# Altium PCB HYDRA_V3_TEMPLATE.PcbDoc
Units mm, origin at the board's own origin, x right, y up, seen from the top; angles counter-clockwise.
Board outline 50 x 45 mm, 4 copper layers (Top Layer, PWR, GND, Bottom Layer), stack 0.603 mm thick; 84 components, 47 nets, 355 pads, 88 vias.
Unrouted connection lines stored in the file: 1.
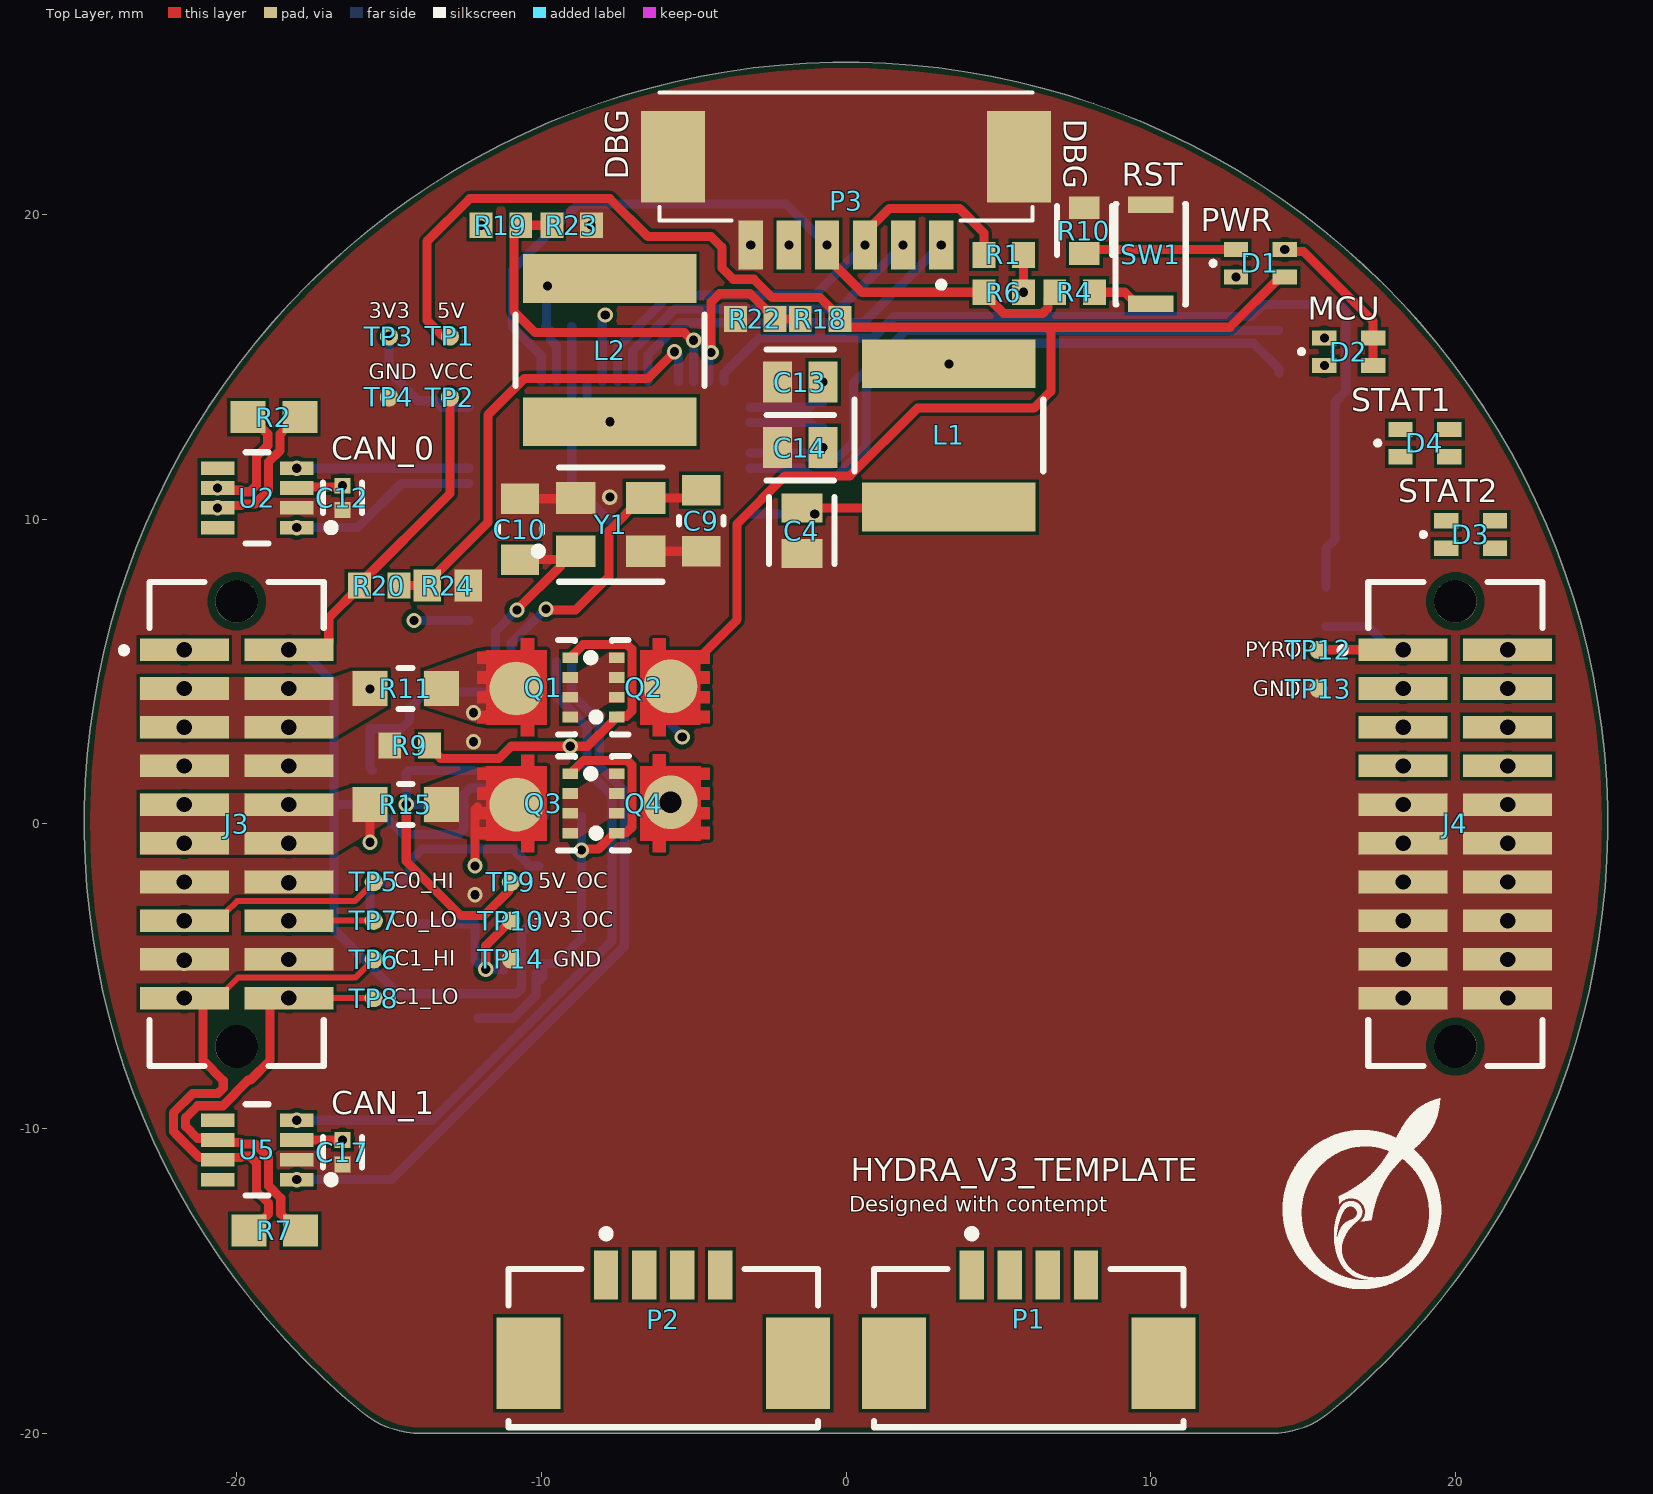
[diagram p0: Top Layer view]
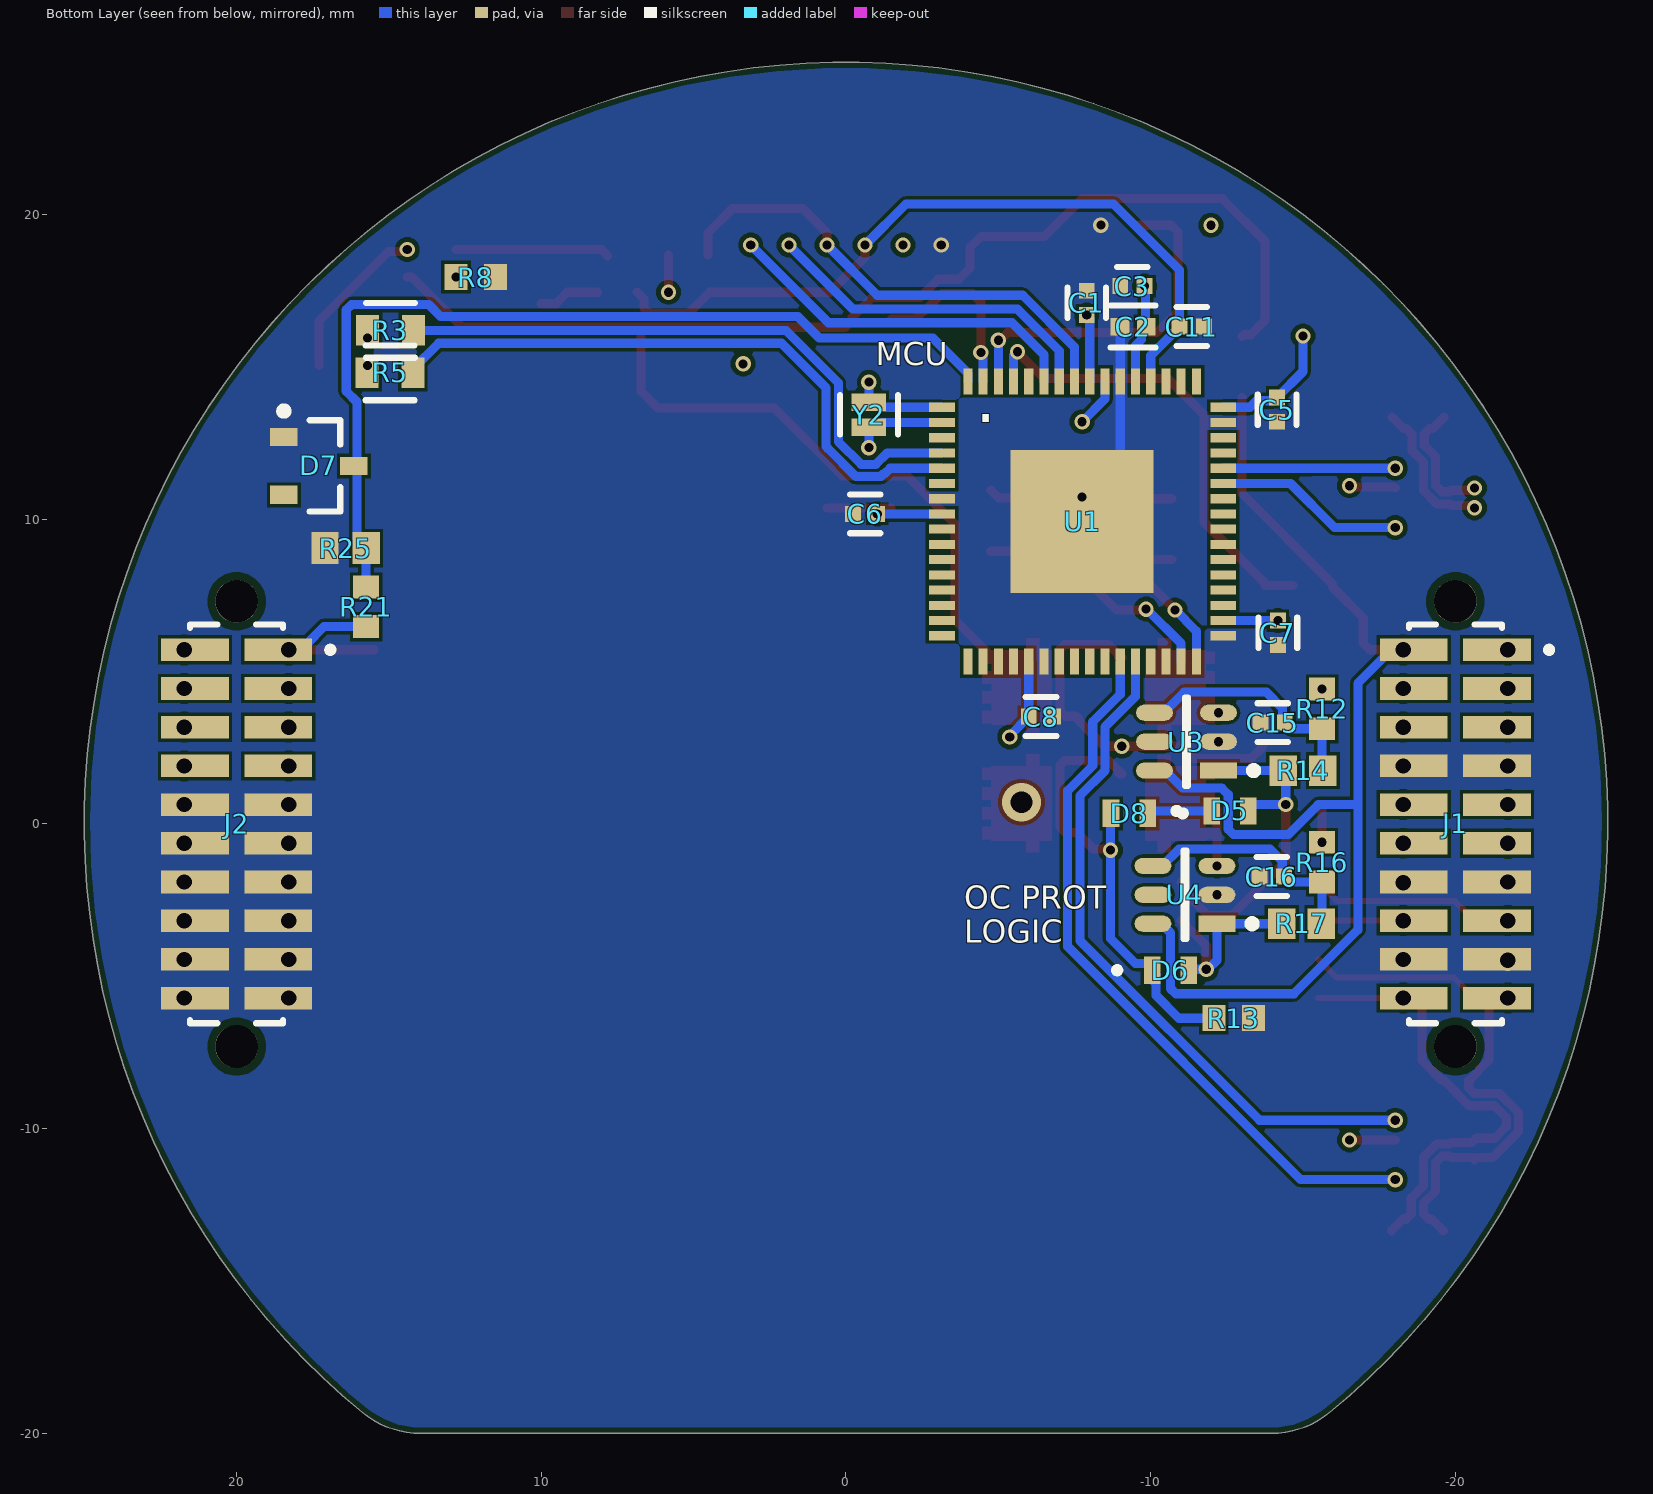
[diagram p1: Bottom Layer view, seen from below]
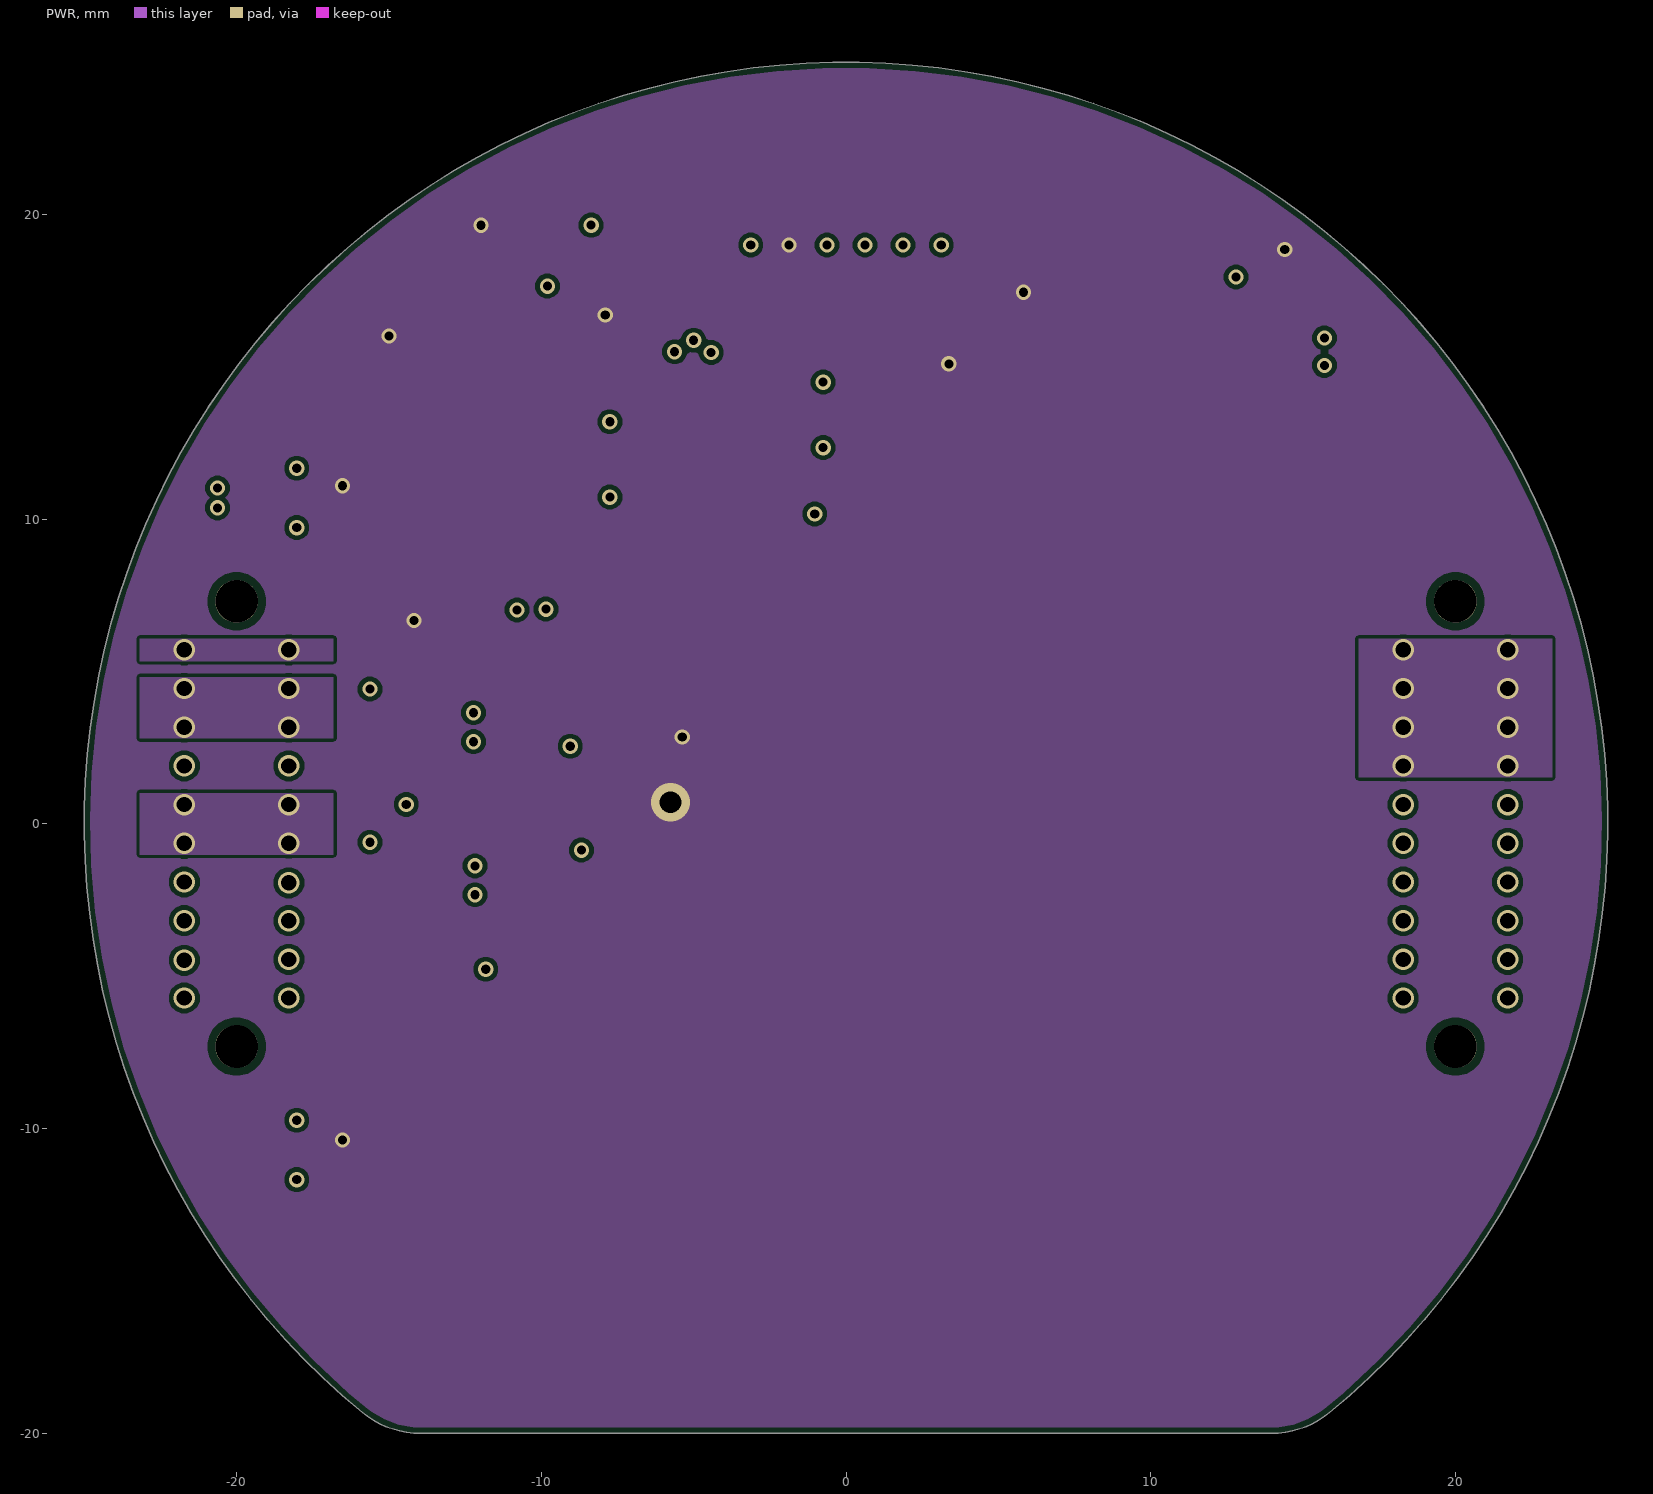
[diagram p2: PWR]
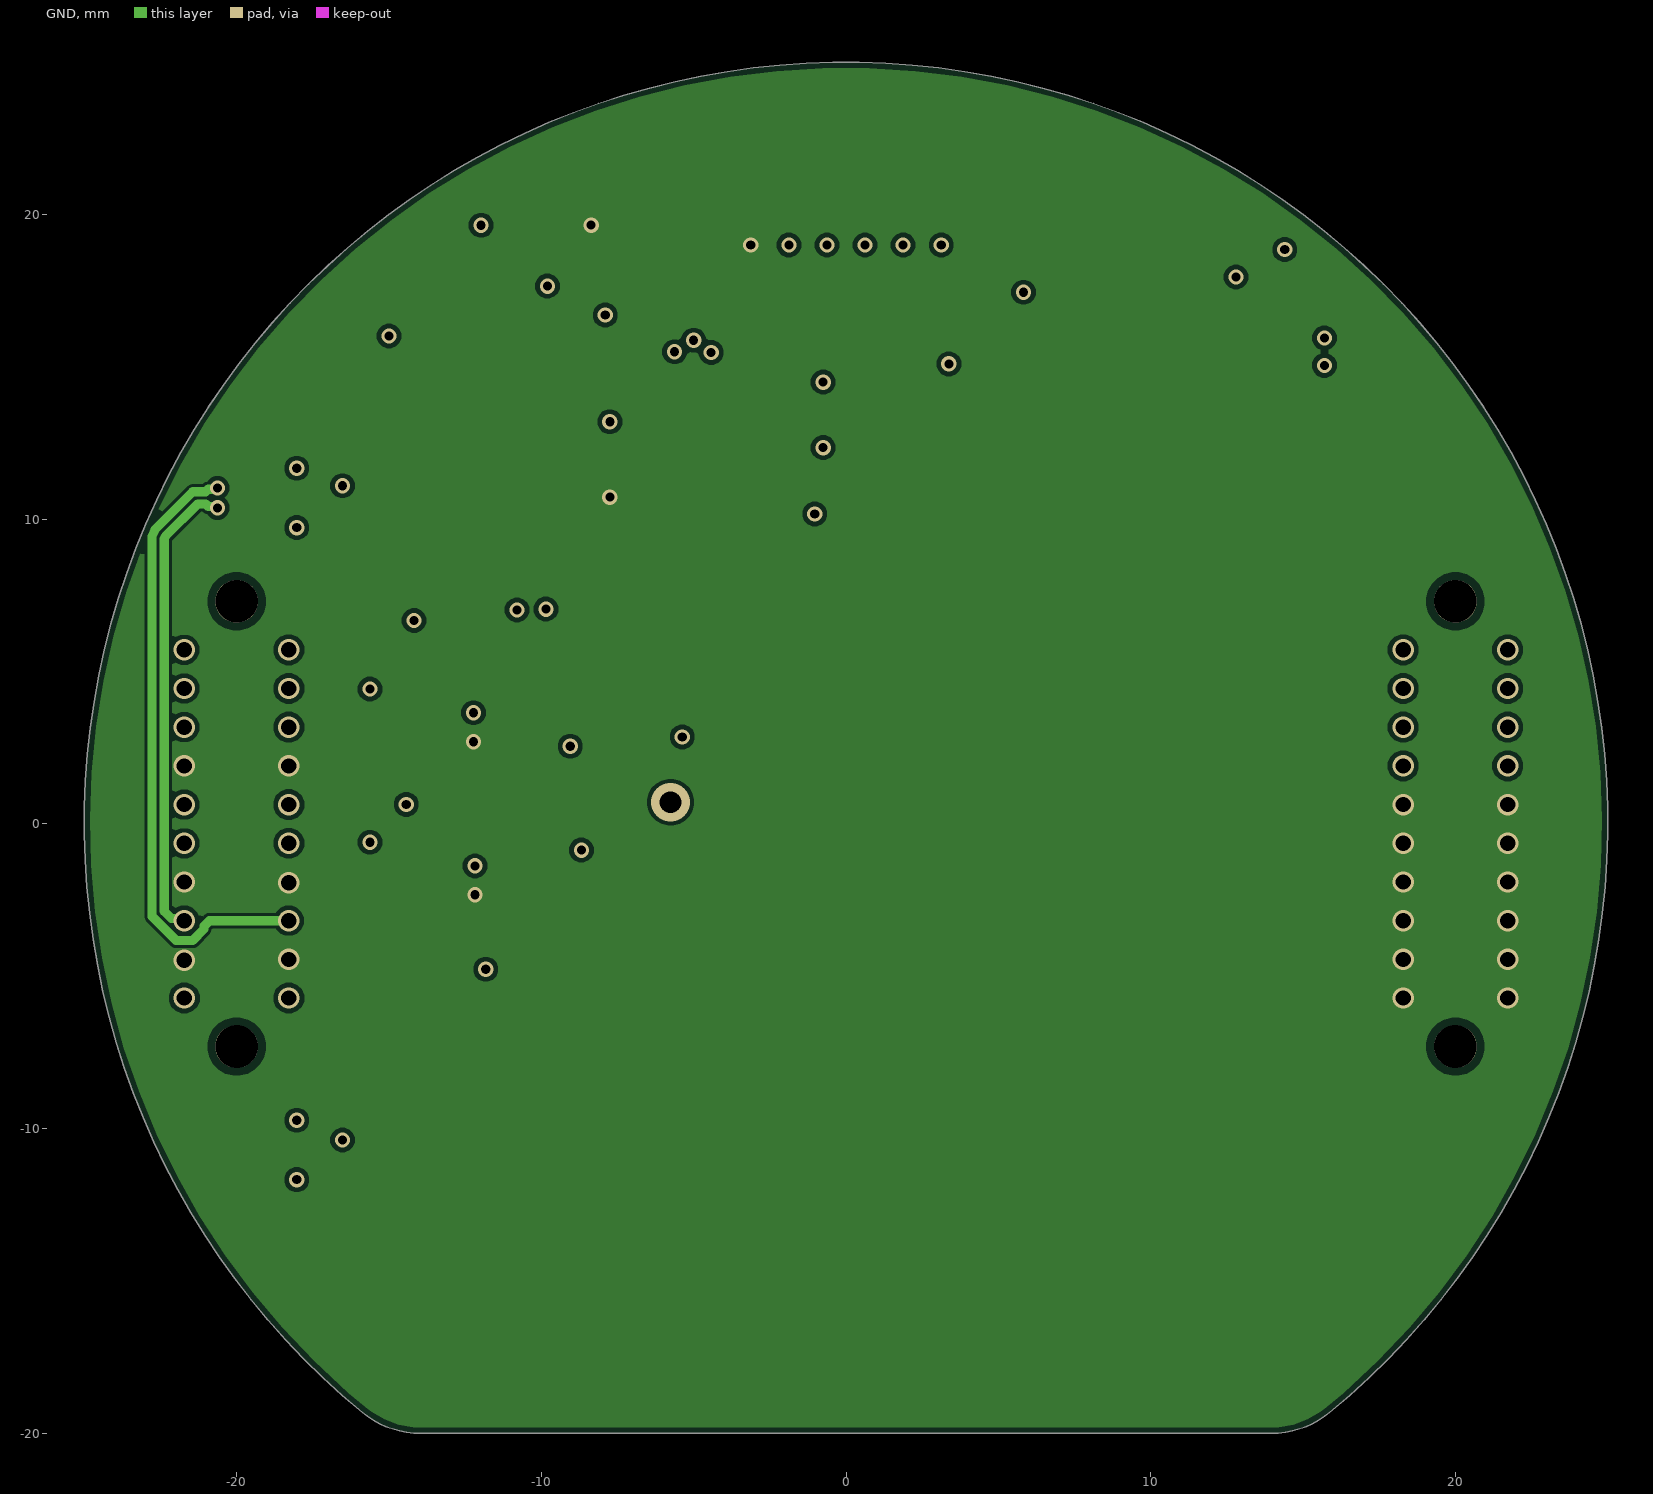
[diagram p3: GND]
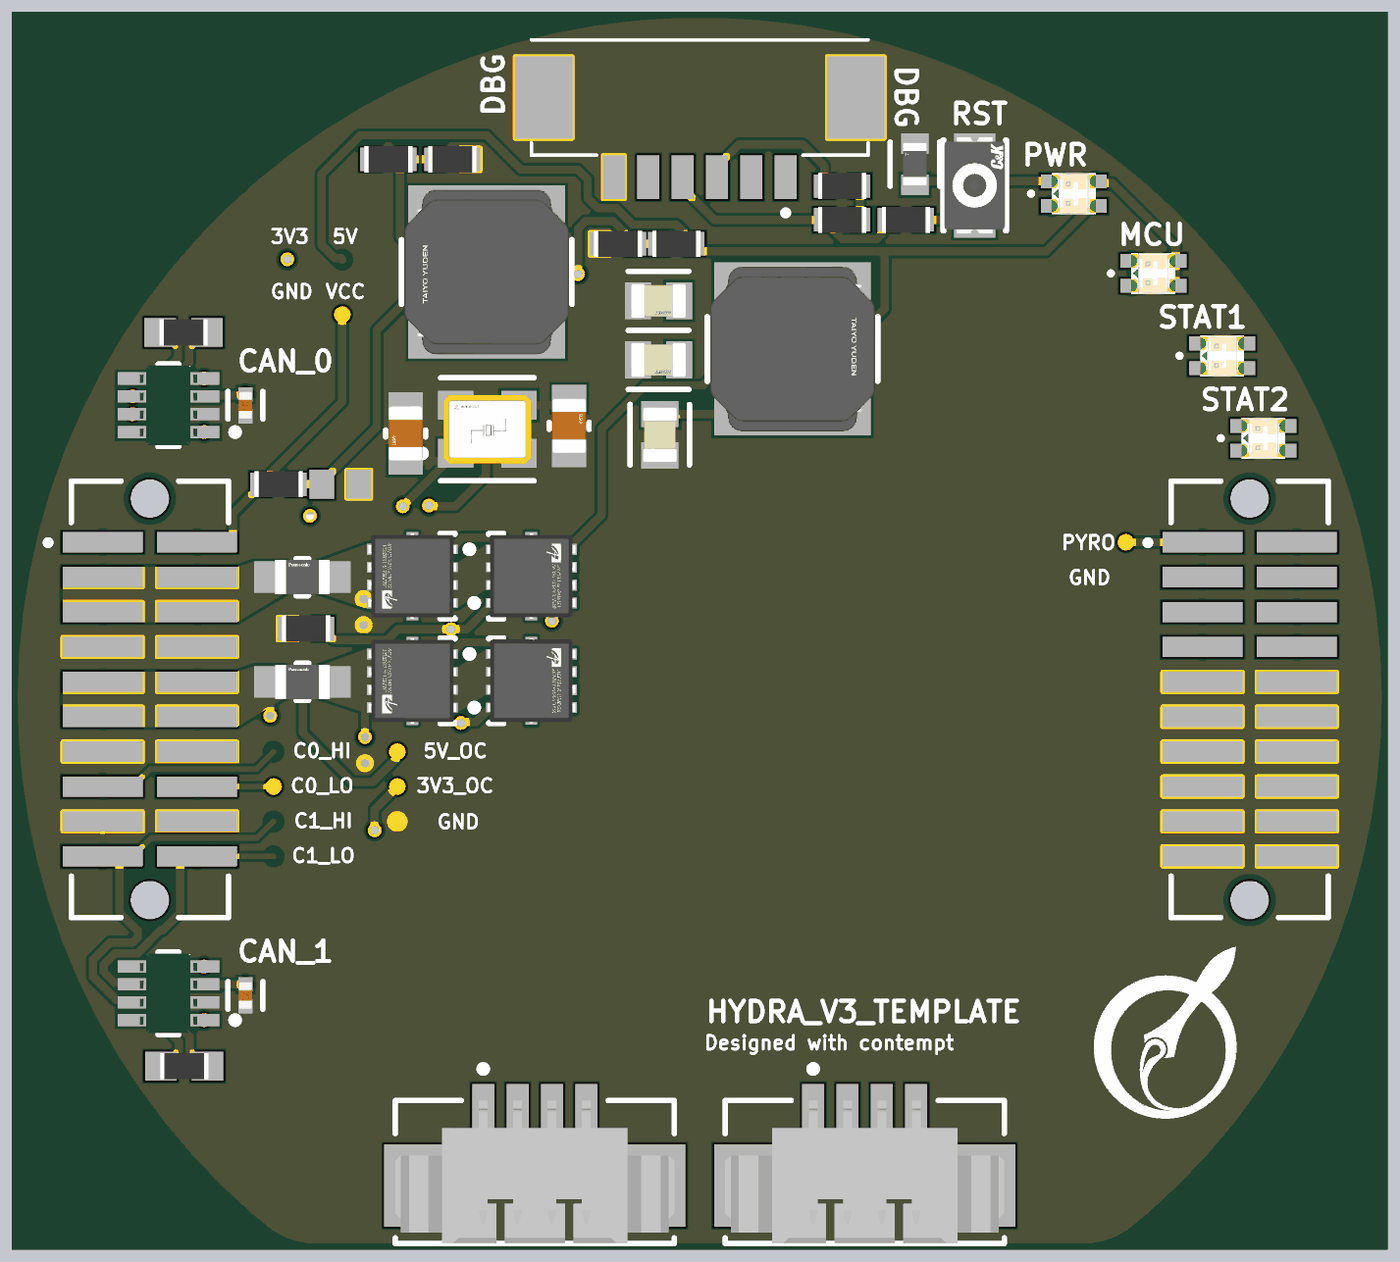
[diagram p4: 3D render of the assembled board from above, using the file's embedded part models]
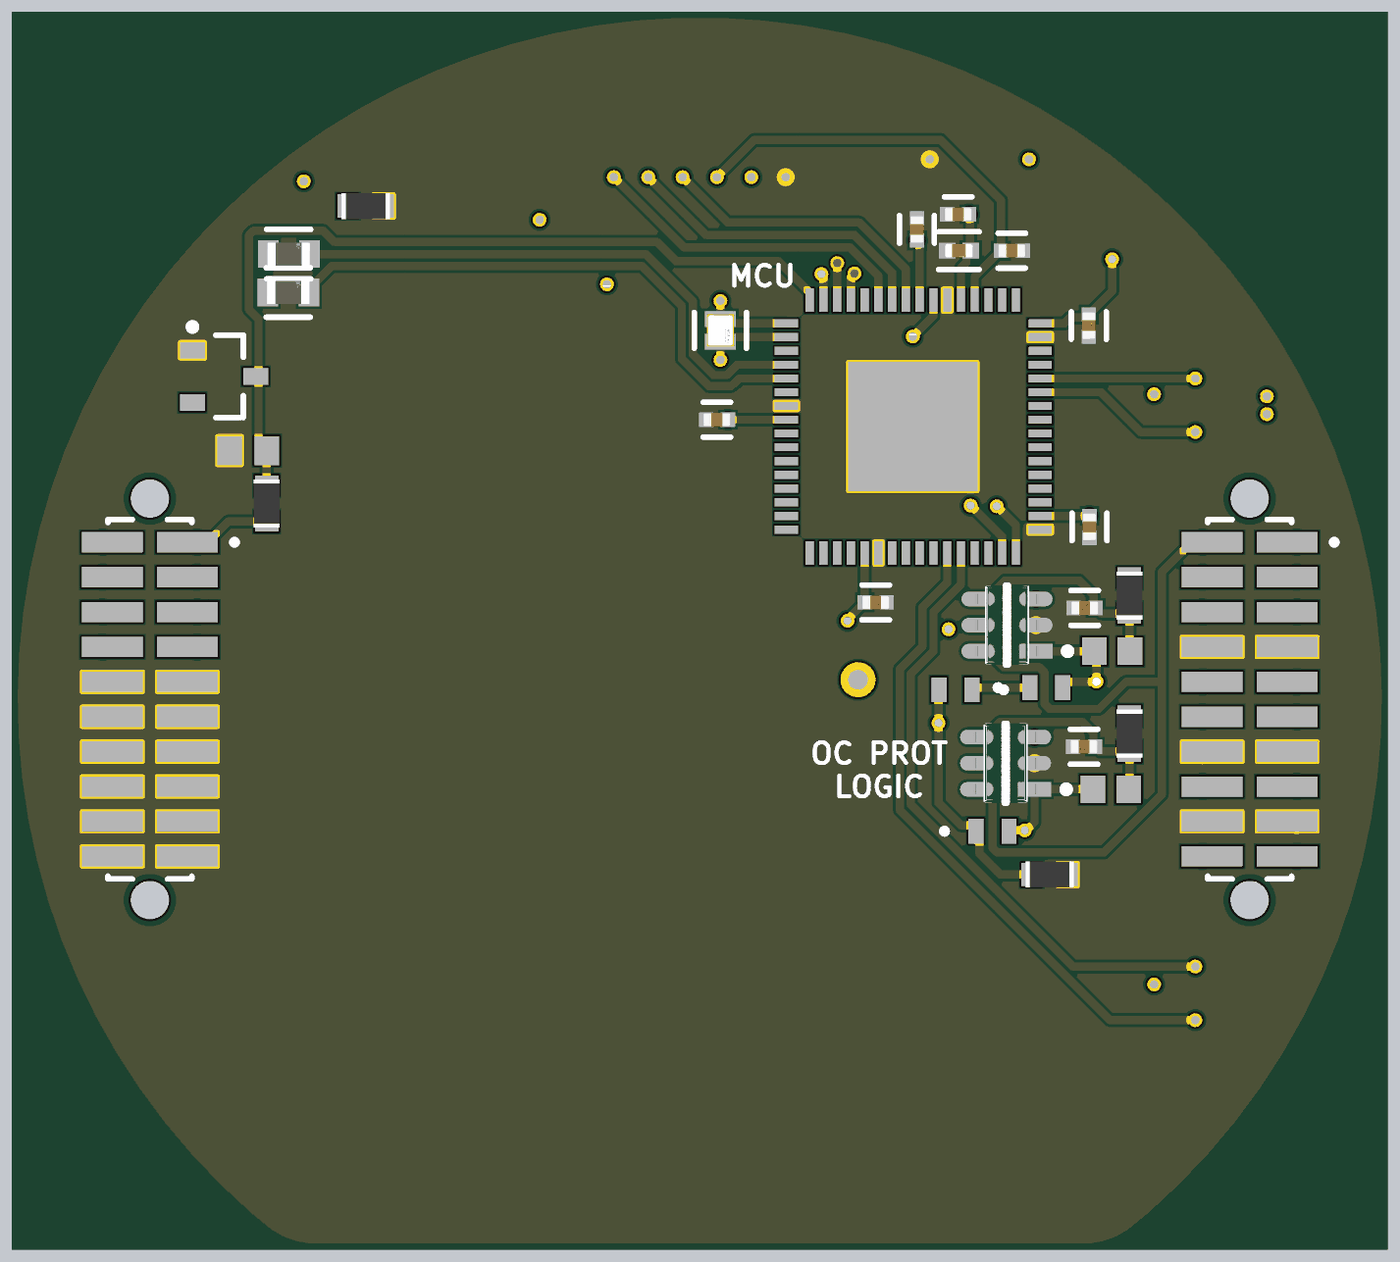
[diagram p5: 3D render of the assembled board from below, using the file's embedded part models]

## Layer stack, top to bottom
Top Solder: solder mask 0.0102, Solder Resist, Dk 3.5
Top Layer: signal copper 0.0356
Dielectric 2: prepreg 0.0711, PP-006, Dk 4.1
PWR: signal copper 0.035
Dielectric 1: dielectric 0.32, FR-4, Dk 4.8
GND: signal copper 0.035
Dielectric 3: prepreg 0.0711, PP-006, Dk 4.1
Bottom Layer: signal copper 0.0356
Bottom Solder: solder mask 0.0102, Solder Resist, Dk 3.5

## Board outline
-15.888,-19.298 ccw(c-13.96,-17) -13.96,-20 13.96,-20 ccw(c13.96,-17) 15.888,-19.298 15.868,-19.318 ccw(c0,0)

## Design rules (kind name [scope] priority, off if disabled: settings)
BoardOutlineClearance [All] p1: gap=0.2 ignorepadtopadclearanceinfootprint=FALSE
Clearance [All] p1: gap=0.102 ignorepadtopadclearanceinfootprint=FALSE except(0.127: Arc-Via Track-Via SMDPad-Via THPad-Via Via-Via Via-Fill Via-Poly Via-Region Via-Text; 0.25: Arc-Hole Track-Hole SMDPad-Hole THPad-Hole Via-Hole Fill-Hole Poly-Hole Region-Hole Text-Hole)
ComponentClearance [All] p1: gap=0.102 collisioncheckmode=3 verticalgap=0.102 showdistances=TRUE
DiffPairsRouting [All] p1: maxlimit=0.102 minlimit=0.102 mostfreqgap=0.102 toplayer_minwidth=0.102 toplayer_maxwidth=1816.048 toplayer_prefwidth=0.102 midlayer1_minwidth=0.102 midlayer1_maxwidth=1816.048 midlayer1_prefwidth=0.102 midlayer2_minwidth=0.102 midlayer2_maxwidth=1816.048 midlayer2_prefwidth=0.102 bottomlayer_minwidth=0.102 bottomlayer_maxwidth=1816.048 bottomlayer_prefwidth=0.102 maxuncoupledlength=12.7
Height [All] p1: minheight=0 maxheight=1816.048 prefheight=12.7
HoleSize [All] p1: absolutevalues=TRUE maxlimit=6.3 minlimit=0.2 maxpercent=80.000 minpercent=20.000
HoleToHoleClearance [All] p1: gap=0.25 allowstackedmicrovias=FALSE
MinimumAnnularRing [All] p1: minimumring=0.076
MinimumSolderMaskSliver [All] p1: minsoldermaskwidth=0
PlaneClearance [All] p1: clearance=0.102
PlaneConnect PlaneConnectPowerPads [InPadClass('PowerPads')] p1: planeconnectstyle=Direct reliefexpansion=0.508 reliefentries=4 reliefconductorwidth=0.254 reliefairgap=0.254
PlaneConnect [All] p2: pad.planeconnectstyle=Relief pad.reliefexpansion=0.3 pad.reliefentries=4 pad.reliefconductorwidth=0.102 pad.reliefairgap=0.102 via.planeconnectstyle=Direct via.reliefexpansion=0.3 via.reliefentries=4 via.reliefconductorwidth=0.127 via.reliefairgap=0.127
PolygonConnect PolygonConnectPowerPads [All vs (InPadClass('PowerPads'))] p1: connectstyle=Direct reliefconductorwidth=0.254 reliefentries=4 polygonreliefangle="90 Angle" airgapwidth=0.254
PolygonConnect [All] p2: thpad.connectstyle=Relief thpad.reliefconductorwidth=0.102 thpad.reliefentries=4 thpad.polygonreliefangle="90 Angle" thpad.airgapwidth=0.102 smdpad.connectstyle=Direct smdpad.reliefconductorwidth=0.102 smdpad.reliefentries=4 smdpad.polygonreliefangle="90 Angle" smdpad.airgapwidth=0.102 via.connectstyle=Direct via.reliefconductorwidth=0.127 via.reliefentries=4 via.polygonreliefangle="90 Angle" via.airgapwidth=0.127
RoutingVias [All] p1: holewidth=0.2 width=0.45 viastyle="Through Hole" minholewidth=0.2 minwidth=0.45 maxholewidth=6.3 maxwidth=6.55
SilkToSilkClearance [All] p1: silktosilkclearance=0
SilkToSolderMaskClearance [IsPad] p1: minsilkscreentomaskgap=0.102 clearancetoexposedcopper=TRUE
SolderMaskExpansion [All] p1: expansion=0.075 istentingtop=FALSE
Width [All] p1: maxlimit=1816.048 minlimit=0.102 preferedwidth=0.102
20 further rules are at their usual default settings.

## Classes and differential pairs
component class OC_PROT: C15 C16 D5 D6 D8 Q1 Q2 Q3 Q4 R9 R11 R12 R13 R14 R15 R16 R17 TP9 TP10 TP14 U3 U4
component class MCU_PINOUT: C1 C2 C3 C4 C5 C6 C7 C8 C9 C10 C11 C12 C13 C14 C17 D1 D2 D7 L1 L2 P3 R1 R2 R3 R4 R5 R6 R7 R8 R10 R18 R19 R20 R21 R22 R23 R24 R25 SW1 TP1 TP2 TP3 TP4 TP5 TP6 TP7 TP8 TP12 TP13 U1 U2 U5 Y1 Y2
component class HYDRA_V3_TEMPLATE: D3 D4 J1 J2 J3 J4 P1 P2
differential pair CAN1_R: +CAN1_R_P -CAN1_R_N
differential pair CAN0_R: +CAN0_R_P -CAN0_R_N

## Components (designator, comment, footprint, x,y, rotation, side; value= is the part's Value field where it differs from the comment)
C1 "C0402C104K8PACTU" FP-C0402-BB-MFG -7.9,17.1 r90 bottom value="0.10 μF"
C2 "GRM155R60J475ME47D" FP-GRM155-0_1-IPC_B -9.425,16.325 r180 bottom
C3 "C0402C104K8PACTU" FP-C0402-BB-MFG -9.4,17.65 r0 bottom value="0.10 μF"
C4 "C0805C106K8PACTU" FP-C0805C-DG-MFG -1.45,9.625 r270 top value=10uF
C5 "C0402C104K8PACTU" FP-C0402-BB-MFG -14.15,13.6 r270 bottom value="0.10 μF"
C6 "C0402C104K8PACTU" FP-C0402-BB-MFG -0.625,10.175 r0 bottom value="0.10 μF"
C7 "C0402C104K8PACTU" FP-C0402-BB-MFG -14.175,6.275 r270 bottom value="0.10 μF"
C8 "C0402C104K8PACTU" FP-C0402-BB-MFG -6.4,3.525 r180 bottom value="0.10 μF"
C9 "08051A6R8CAT2A" FP-0805-L_2_01_0_2-W_1_25-MFG -4.75,9.95 r90 top
C10 "08051A6R8CAT2A" FP-0805-L_2_01_0_2-W_1_25-MFG -10.7,9.675 r270 top
C11 "C0402C104K8PACTU" FP-C0402-BB-MFG -11.35,16.325 r180 bottom value="0.10 μF"
C12 "C0402C104K8PACTU" FP-C0402-BB-MFG -16.525,10.7 r90 top value="0.10 μF"
C13 "C0805C180J5GACTU" FP-C0805C-DN-MFG -1.5,14.5 r180 top value="18 pF"
C14 "C0805C180J5GACTU" FP-C0805C-DN-MFG -1.5,12.35 r180 top value="18 pF"
C15 "C0402C104K8PACTU" FP-C0402-BB-MFG -14,3.325 r0 bottom value="0.10 μF"
C16 "C0402C104K8PACTU" FP-C0402-BB-MFG -13.975,-1.725 r0 bottom value="0.10 μF"
C17 "C0402C104K8PACTU" FP-C0402-BB-MFG -16.525,-10.775 r90 top value="0.10 μF"
D1 "150066RG54050" WL-SBCD_0606 13.6,18.4 r90 top
D2 "150066RG54050" WL-SBCD_0606 16.5,15.5 r90 top
D3 "150066RG54050" WL-SBCD_0606 20.5,9.5 r90 top
D4 "150066RG54050" WL-SBCD_0606 19,12.5 r90 top
D5 "TS4148RCG" TS4148RCG-Footprint-1 -12.6,0.425 r180 bottom
D6 "TS4148RCG" TS4148RCG-Footprint-1 -10.65,-4.8 r180 bottom
D7 "BZX84-A3V3,215" SOT95P230X110-3N 17.3,11.75 r180 bottom
D8 "TS4148RCG" TS4148RCG-Footprint-1 -9.3,0.347 r0 bottom
J1 "SFML-110-02-L-D-A" SFML-110-02-L-D-A-Footprint-1 -20,0 r270 bottom
J2 "SFML-110-02-L-D-A" SFML-110-02-L-D-A-Footprint-1 20,0 r270 bottom
J3 "TFML-110-02-L-D-A" TFML-110-02-L-D-A-Footprint-1 -20,0 r270 top
J4 "TFML-110-02-L-D-A" TFML-110-02-L-D-A-Footprint-1 20,0 r270 top
L1 "NR6028T100M" FP-NR6028-MFG 3.375,12.75 r270 top
L2 "NR6028T100M" FP-NR6028-MFG -7.75,15.55 r90 top
P1 "53261-0471" MOLEX-53261-0471_V 6,-16.25 r0 top locked
P2 "53261-0471" MOLEX-53261-0471_V -6,-16.25 r0 top
P3 "0532610671" 0532610671-Footprint-1 0,19 r180 top locked
Q1 "SISH615ADN-T1-GE3" SISH615ADN-T1-GE3-Footprint-1 -10.452,4.445 r90 top
Q2 "SISH615ADN-T1-GE3" SISH615ADN-T1-GE3-Footprint-1 -6.127,4.52 r270 top
Q3 "SISH615ADN-T1-GE3" SISH615ADN-T1-GE3-Footprint-1 -10.45,0.635 r90 top
Q4 "SISH615ADN-T1-GE3" SISH615ADN-T1-GE3-Footprint-1 -6.125,0.713 r270 top
R1 "ERJ3EKF1002V" RESC1609X55X30LL15T15 5.175,18.675 r0 top
R2 "ERJ-3EKF1200V" RESC1609X55X30ML15T15 -18.775,13.35 r0 top
R3 "CRCW060351R0FKEA" FP-CRCW0603-e3-MFG 14.95,16.2 r180 bottom
R4 "ERJ-3EKF3300V" RESC1608X55X30LL15T15 7.5,17.45 r0 top
R5 "CRCW060351R0FKEA" FP-CRCW0603-e3-MFG 14.966,14.805 r180 bottom
R6 "ERJ3EKF1002V" RESC1609X55X30LL15T15 5.175,17.45 r180 top
R7 "ERJ-3EKF1200V" RESC1609X55X30ML15T15 -18.75,-13.35 r180 top
R8 "ERJ-3EKF3300V" RESC1608X55X30LL15T15 12.15,17.95 r180 bottom
R9 "ERJ3EKF1002V" RESC1609X55X30LL15T15 -14.325,2.575 r0 top
R10 "CRCW060351R0FKEA" FP-CRCW0603-e3-MFG 7.825,19.475 r90 top
R11 "ERJ-6DSFR10V" FP-ERJ6D-MFG -14.453,4.445 r0 top
R12 "ERJ3EKF1002V" RESC1609X55X30LL15T15 -15.625,3.775 r90 bottom
R13 "ERJ3EKF1002V" RESC1609X55X30LL15T15 -12.725,-6.375 r0 bottom
R14 "RT0603BRD071ML" RESC1608X55X30NL20T20 -15,1.75 r180 bottom
R15 "ERJ-6DSFR10V" FP-ERJ6D-MFG -14.45,0.635 r0 top
R16 "ERJ3EKF1002V" RESC1609X55X30LL15T15 -15.625,-1.25 r90 bottom
R17 "RT0603BRD071ML" RESC1608X55X30NL20T20 -14.95,-3.275 r180 bottom
R18 "ERJ3EKF1002V" RESC1609X55X30LL15T15 -0.85,16.575 r0 top
R19 "ERJ3EKF1002V" RESC1609X55X30LL15T15 -11.325,19.65 r180 top
R20 "ERJ3EKF1002V" RESC1609X55X30LL15T15 -15.318,7.825 r180 top
R21 "ERJ3EKF1002V" RESC1609X55X30LL15T15 15.75,7.125 r270 bottom
R22 "ERJ3EKF1002V" RESC1609X55X30LL15T15 -2.975,16.575 r0 top
R23 "ERJ3EKF1002V" RESC1609X55X30LL15T15 -9,19.65 r180 top
R24 "CRCW06032K70JNEA" RESC1609X50X30ML10T20 -13.075,7.825 r180 top
R25 "CRCW06032K70JNEA" RESC1609X50X30ML10T20 16.425,9.05 r180 bottom
SW1 "KXT331LHS" FP-KXT331LHS-MFG 10,18.7 r90 top locked
TP1 "TPAD6R" TP06R#1 -22.125,24.7 r90 top
TP2 "TPAD6R" TP06R#2 -14.025,15.8 r90 top
TP3 "TPAD6R" TP06R#3 -22.85,24.45 r90 top
TP4 "TPAD6R" TP06R#4 -23.975,22.625 r90 top
TP5 "TPAD6R" TP06R#5 -28.375,-1.905 r90 top
TP6 "TPAD6R" TP06R#6 -29.725,-4.445 r90 top
TP7 "TPAD6R" TP06R#7 -15.65,-3.175 r90 top
TP8 "TPAD6R" TP06R#8 -41.738,-5.715 r90 top
TP9 "TPAD6R" TP06R#9 -11,-1.905 r90 top
TP10 "TPAD6R" TP06R#10 -11.062,-3.175 r90 top
TP12 "TPAD6R" TP06R#11 15.325,5.715 r90 top
TP13 "TPAD6R" TP06R#12 30.1,4.445 r90 top
TP14 "TPAD6R" TP06R#13 -10.862,-4.445 r90 top
U1 "SAM_E51_64VQFN" SAM_E51_64VQFN-Footprint-1 -4,5.325 r180 bottom
U2 "TCAN330GDCNR" FP-DCN0008A-MFG -19.325,10.7 r180 top
U3 "TLV1805DBVR" FP-DBV0006A-IPC_C -11.175,2.7 r0 bottom
U4 "TLV1805DBVR" FP-DBV0006A-IPC_C -11.125,-2.325 r0 bottom
U5 "TCAN330GDCNR" FP-DCN0008A-MFG -19.325,-10.7 r180 top
Y1 "ABM8-48.000MHZ-B2-T" FP-ABM8-MFG -7.725,9.825 r0 top
Y2 "ECS-.327-12.5-1210-TR" FP-ECX-1210-MFG -0.75,13.425 r270 bottom

## Footprints (in the part's own frame and the unit in brackets; to place one, negate y for a bottom-side part, rotate by r counter-clockwise, add the part's x,y. Pads: shape width x height; smd on the part's side, far side on the other; paste and mask are expansions set on the pad)
0532610671-Footprint-1 [mm]
  rect 0.8x1.6 smd: 1(-3.125,0) 2(-1.875,0) 3(-0.625,0) 4(0.625,0) 5(1.875,0) 6(3.125,0)
  rect 2.1x3 smd: S1(-5.675,-2.9) S2(5.675,-2.9)
  silkscreen extent -6.12,-5 6.12,1.4
FP-0805-L_2_01_0_2-W_1_25-MFG [mm]
  rect 1x1.25 smd paste+0 mask+0: 1(-1,0) 2(1,0)
  silkscreen extent -0.13,-0.72 0.13,0.72, body extent -1.6,-0.82 1.6,0.82, height 0.25
FP-ABM8-MFG [mm]
  rect 1.3x1.05 smd paste+0 mask+0: 1(-1.15,-0.875) 2(1.15,-0.875) 3(1.15,0.875) 4(-1.15,0.875)
  silkscreen extent -2.5,-1.88 1.7,1.88, body extent -1.6,-1.25 1.6,1.25, height 0.8
FP-C0402-BB-MFG [mm]
  rect 0.52x0.52 smd paste+0 mask+0: 1(-0.4,0) 2(0.4,0)
  silkscreen extent -0.5,-0.64 0.5,0.64, body extent -0.5,-0.25 0.5,0.25, height 0.55
FP-C0805C-DG-MFG [mm]
  rect 0.95x1.35 smd paste+0 mask+0: 1(-0.75,0) 2(0.75,0)
  silkscreen extent -1.11,-1.08 1.1,1.07, body extent -1.4,-0.85 1.4,0.85, height 0.25
FP-C0805C-DN-MFG [mm]
  rect 0.95x1.35 smd paste+0 mask+0: 1(-0.75,0) 2(0.75,0)
  silkscreen extent -1.1,-1.07 1.1,1.07, body extent -1.4,-0.85 1.4,0.85, height 0.25
FP-CRCW0603-e3-MFG [mm]
  rect 0.75x1 smd paste+0 mask+0: 1(-0.75,0) 2(0.75,0)
  silkscreen extent -0.8,-0.9 0.8,0.9, body extent -0.77,-0.43 0.77,0.43, height 0.5
FP-DBV0006A-IPC_C [mm]
  rect 1.205x0.53 smd paste+0 mask+0: 1(-1.05,0.95)
  rrect100% 1.205x0.53 smd paste+0 mask+0: 2(-1.05,0) 3(-1.05,-0.95) 4(1.05,-0.95) 5(1.05,0) 6(1.05,0.95)
  silkscreen extent -2.33,-1.45 0.05,1.45, body extent -1.4,-1.45 1.4,1.45, height 1.45
FP-DCN0008A-MFG [mm]
  rect 1.1x0.45 smd paste+0 mask+0: 1(-1.3,0.975) 2(-1.3,0.325) 3(-1.3,-0.325) 4(-1.3,-0.975) 5(1.3,-0.975) 6(1.3,-0.325) 7(1.3,0.325) 8(1.3,0.975)
  silkscreen extent -2.55,-1.5 0.38,1.5, body extent -1.95,-1.85 1.95,1.85, height 0.25
FP-ECX-1210-MFG [mm]
  rect 0.575x1.14 smd paste+0 mask+0: 1(-0.413,0) 2(0.413,0)
  silkscreen extent -0.65,-0.95 0.65,0.95, body extent -0.6,-0.5 0.6,0.5, height 0.5
FP-ERJ6D-MFG [mm]
  rect 1.15x1.15 smd paste+0 mask+0: 1(-1.175,0) 2(1.175,0)
  silkscreen extent -0.23,-0.67 0.23,0.67, body extent -1.85,-0.77 1.85,0.77, height 0.25
FP-GRM155-0_1-IPC_B [mm]
  rect 0.615x0.572 smd paste+0 mask+0: 1(-0.429,0) 2(0.429,0)
  silkscreen extent -0.74,-0.69 0.74,0.69, body extent -0.5,-0.25 0.5,0.25, height 0.6
FP-KXT331LHS-MFG [mm]
  rect 0.55x1.5 smd paste+0 mask+0: 1(-1.625,0) 2(1.625,0)
  silkscreen extent -1.65,-1.15 1.65,1.15, body extent -2,-1.25 2,1.25, height 0.25
FP-NR6028-MFG [mm]
  rect 1.6x5.7 smd paste+0 mask+0: 1(-2.35,0) 2(2.35,0)
  silkscreen extent -1.17,-3.1 1.17,3.1, body extent -3.25,-3.2 3.25,3.2, height 0.25
MOLEX-53261-0471_V [mm] "SMD, 4-Leads, Body 10.15x5.2mm, Pitch 1.25mm"
  rect 0.8x1.6 smd: 1(-1.875,1.45) 2(-0.625,1.45) 3(0.625,1.45) 4(1.875,1.45)
  rect 2.1x3 smd: MP1(-4.425,-1.45) MP2(4.425,-1.45)
  silkscreen extent -5.08,-3.55 5.08,2.93, body extent -5.08,-3.55 5.07,1.65, height 3.4
RESC1608X55X30LL15T15 [mm] "Chip Resistor, 2-Leads, Body 1.75x0.95mm, IPC High Density"
  rect 0.75x0.85 smd: 1(-0.65,0) 2(0.65,0)
  body extent -0.87,-0.48 0.87,0.48, height 0.55
RESC1608X55X30NL20T20 [mm] "Chip Resistor, 2-Leads, Body 1.60x0.80mm, IPC Medium Density"
  rect 0.9x1 smd: 1(-0.65,0) 2(0.65,0)
  body extent -0.9,-0.5 0.9,0.5, height 0.55
RESC1609X50X30ML10T20 [mm] "Chip Resistor, 2-Leads, Body 1.55x0.85mm, IPC Low Density"
  rect 0.9x1.05 smd: 1(-0.675,0) 2(0.675,0)
  body extent -0.82,-0.48 0.82,0.48, height 0.5
RESC1609X55X30LL15T15 [mm] "Chip Resistor, 2-Leads, Body 1.75x0.95mm, IPC High Density"
  rect 0.75x0.85 smd: 1(-0.65,0) 2(0.65,0)
  body extent -0.87,-0.48 0.87,0.48, height 0.55
RESC1609X55X30ML15T15 [mm] "Chip Resistor, 2-Leads, Body 1.75x0.95mm, IPC Low Density"
  rect 1.15x1.05 smd: 1(-0.85,0) 2(0.85,0)
  body extent -0.87,-0.48 0.87,0.48, height 0.55
SAM_E51_64VQFN-Footprint-1 [mm]
  rect 0.85x0.3 smd: 1(-0.85,8.35) 2(-0.85,7.85) 3(-0.85,7.35) 4(-0.85,6.85) 5(-0.85,6.35) 6(-0.85,5.85) 7(-0.85,5.35) 8(-0.85,4.85) 9(-0.85,4.35) 10(-0.85,3.85) 11(-0.85,3.35) 12(-0.85,2.85) 13(-0.85,2.35) 14(-0.85,1.85) 15(-0.85,1.35) 16(-0.85,0.85) 33(8.382,0.85) 34(8.382,1.35) 35(8.382,1.85) 36(8.382,2.35) 37(8.382,2.85) 38(8.382,3.35) 39(8.382,3.85) 40(8.382,4.35) 41(8.382,4.85) 42(8.382,5.35) 43(8.382,5.85) 44(8.382,6.35) 45(8.382,6.85) 46(8.382,7.35) 47(8.382,7.85) 48(8.382,8.35)
  rect 0.3x0.85 smd: 17(0,0) 18(0.5,0) 19(1,0) 20(1.5,0) 21(2,0) 22(2.5,0) 23(3,0) 24(3.5,0) 25(4,0) 26(4.5,0) 27(5,0) 28(5.5,0) 29(6,0) 30(6.5,0) 31(7,0) 32(7.5,0) 49(7.5,9.2) 50(7,9.2) 51(6.5,9.2) 52(6,9.2) 53(5.5,9.2) 54(5,9.2) 55(4.5,9.2) 56(4,9.2) 57(3.5,9.2) 58(3,9.2) 59(2.5,9.2) 60(2,9.2) 61(1.5,9.2) 62(1,9.2) 63(0.5,9.2) 64(0,9.2)
  rect 4.7x4.7 smd: 65(3.75,4.6)
SFML-110-02-L-D-A-Footprint-1 [mm]
  rect 0.74x2.22 smd: 01(-5.715,1.365) 02(-5.715,-1.365) 03(-4.445,1.365) 04(-4.445,-1.365) 05(-3.175,1.365) 06(-3.175,-1.365) 07(-1.905,1.365) 08(-1.905,-1.365) 09(-0.635,1.365) 10(-0.635,-1.365) 11(0.635,1.365) 12(0.635,-1.365) 13(1.905,1.365) 14(1.905,-1.365) 15(3.175,1.365) 16(3.175,-1.365) 17(4.445,1.365) 18(4.445,-1.365) 19(5.715,1.365) 20(5.715,-1.365)
  round 1.4 hole 1.4 unplated: ""(-7.305,0) ""(7.305,0)
  silkscreen extent -6.54,-1.53 6.54,3.17
SISH615ADN-T1-GE3-Footprint-1 [mm]
  rect 0.35x0.5 smd paste+0 mask+0: 1(-0.937,-1.4) 2(-0.288,-1.4) 3(0.363,-1.4) 4(1.012,-1.4)
  round 1.769 smd paste+0 mask+0: 5-6-7-8(0,0.367)
  Top Layer region: -1.187,-0.63 -1.187,-0.215 -1.568,-0.215 -1.568,0.215 -1.187,0.215 -1.187,1.35 -1.137,1.35 -1.137,1.65 -0.737,1.65 -0.737,1.35 -0.487,1.35 -0.487,1.65 -0.088,1.65 -0.088,1.35 0.163,1.35 0.163,1.65 0.563,1.65 0.563,1.35 0.813,1.35 0.813,1.65 1.212,1.65 1.212,1.35 1.262,1.35 1.262,0.215 1.643,0.215 1.643,-0.215 1.262,-0.215 1.262,-0.63
  silkscreen extent -1.51,-2.38 1.59,-1.01, body extent -1.67,-1.75 1.74,1.75, height 0.25
SOT95P230X110-3N [mm] "SOT23, 3-Leads, Body 2.90x2.30mm, Pitch 0.95mm, IPC Medium Density"
  rect 0.9x0.6 smd: 1(-1.15,0.95) 2(-1.15,-0.95) 3(1.15,0)
  silkscreen extent -1.28,-1.5 0.7,1.92, body extent -0.7,-1.5 0.7,1.5, height 1.1
TFML-110-02-L-D-A-Footprint-1 [mm]
  rect 0.74x2.92 smd: 01(-5.715,-1.715) 02(-5.715,1.715) 03(-4.445,-1.715) 04(-4.445,1.715) 05(-3.175,-1.715) 06(-3.175,1.715) 07(-1.905,-1.715) 08(-1.905,1.715) 09(-0.635,-1.715) 10(-0.635,1.715) 11(0.635,-1.715) 12(0.635,1.715) 13(1.905,-1.715) 14(1.905,1.715) 15(3.175,-1.715) 16(3.175,1.715) 17(4.445,-1.715) 18(4.445,1.715) 19(5.715,-1.715) 20(5.715,1.715)
  round 1.4 hole 1.4 unplated: ""(-7.305,0) ""(7.305,0)
  silkscreen extent -7.94,-3.8 7.94,2.86
TP06R#1 [mm] "Testpoint, round, d=0.6mm"
  round 0.6 smd paste-1: 1(-8.7,-9.125)
TP06R#2 [mm] "Testpoint, round, d=0.6mm"
  round 0.6 smd paste-1: 1(-1.8,-1.025)
TP06R#3 [mm] "Testpoint, round, d=0.6mm"
  round 0.6 smd paste-1: 1(-8.45,-7.85)
TP06R#4 [mm] "Testpoint, round, d=0.6mm"
  round 0.6 smd paste-1: 1(-8.625,-8.975)
TP06R#5 [mm] "Testpoint, round, d=0.6mm"
  round 0.6 smd paste-1: 1(0,-12.875)
TP06R#6 [mm] "Testpoint, round, d=0.6mm"
  round 0.6 smd paste-1: 1(0,-14.225)
TP06R#7 [mm] "Testpoint, round, d=0.6mm"
  round 0.6 smd paste-1: 1(0,-0.15)
TP06R#8 [mm] "Testpoint, round, d=0.6mm"
  round 0.6 smd paste-1: 1(0,-26.238)
TP06R#9 [mm] "Testpoint, round, d=0.6mm"
  round 0.6 smd paste-1: 1(0,0)
TP06R#10 [mm] "Testpoint, round, d=0.6mm"
  round 0.6 smd paste-1: 1(0,-0.062)
TP06R#11 [mm] "Testpoint, round, d=0.6mm"
  round 0.6 smd paste-1: 1(0,-0.175)
TP06R#12 [mm] "Testpoint, round, d=0.6mm"
  round 0.6 smd paste-1: 1(0,14.6)
TP06R#13 [mm] "Testpoint, round, d=0.6mm"
  round 0.6 smd paste-1: 1(0,0.138)
TS4148RCG-Footprint-1 [mm]
  rect 0.55x0.9 smd: A(0.6,0) C(-0.6,0)
  silkscreen extent -1.85,-0.1 -1.65,0.1
WL-SBCD_0606 [mm] "SMT Bi-color Chip LED Diffuesed, body 1.5x1.6mm"
  rect 0.5x0.8 smd: 1(-0.45,0.8) 2(-0.45,-0.8) 3(0.45,-0.8) 4(0.45,0.8)
  silkscreen extent -0.07,1.47 0.07,1.62, body extent -0.75,-0.8 0.75,0.8, height 0.55

## Part data
C1 C3 C5 C6 C7 C8 C11 C12 C15 C16 C17: library part CMP-2008-02046-2, "CAP CER 0.1UF 10V X5R 0402", Capacitance="0.10 μF", Manufacturer=Kemet, Package=C0402-BB, Temperature="-55°C to +125°C", Temperature Characteristic=X5R, Temperature Coefficient=15%, Temperature Range High=+125°C, Temperature Range Low=-55°C, Tolerance=0.1, Voltage Rating="10 V", Automotive=No, Category=Cap, ComponentLink2Description=Datasheet, ComponentLink2URL=https://content.kemet.com/datasheets/KEM_C1002_X7R_SMD.pdf, Device Class L1="Passive Components", Device Class L2=Capacitors, Device Class L3="Ceramic Capacitors", Digikey Description="CAP CER 0.1UF 10V X5R 0402", Height=0.55mm, Ipc Land Pattern Name=CAPC10050X50, Lead Free=Yes, Manufacturer Part Number=C0402C104K8PACTU, Material=Ceramic, Mouser Description="Capacitor 100 nF 10 VDC 0402", Octopart=https://octopart.com/c0402c104k8pactu-kemet-140039, RoHS=TRUE
C2: library part CMP-2008-04549-2, "Chip Multilayer Ceramic Capacitors for General Purpose, 0402, 4.7uF, X5R, 15%, 20%, 6.3V", Capacitance=4.7uF, Case Code (Imperial)=0402, Case Code (Metric)=1005, Dielectric=X5R, Max Operating Temperature=85°C, Min Operating Temperature=-55°C, Package Quantity=10000, Tolerance=20%, Voltage=6.3V, Case/Package=0402, Contact Plating=Tin, Depth=0.5mm, Height=0.5mm, Lead Free="Lead Free", Length=1mm, Mount="Surface Mount", Packaging="Tape and Reel", REACH SVHC="No SVHC", Termination=SMD/SMT, Thickness=0.022inch, Voltage Rating=6.3V, Voltage Rating (DC)=6.3V, Weight=0.000212oz, Width=0.02inch
C4: library part CMP-2007-03243-2, "CAP CER 10UF 10V X5R 0805", 3DS Part Number=220-00001, Capacitance=10uF, Manufacturer=Kemet, Package=C0805C-DG, Temperature="-55°C to +85°C", Temperature Characteristic=X5R, Temperature Coefficient=15%, Temperature Range High=+85°C, Temperature Range Low=-55°C, Tolerance=10%, Voltage=10V, Automotive=No, Category=Cap, ComponentLink2Description=Datasheet, ComponentLink2URL=https://content.kemet.com/datasheets/KEM_C1006_X5R_SMD.pdf, Device Class L1="Passive Components", Device Class L2=Capacitors, Device Class L3="Ceramic Capacitors", Digikey Description="CAP CER 10UF 10V X5R 0805", Height=1.4mm, Ipc Land Pattern Name=CAPC200125X125, Lead Free=Yes, Manufacturer Part Number=C0805C106K8PACTU, Material=Ceramic, Mouser Description="CAP CER 10UF 10V X5R 0805", Octopart=https://octopart.com/c0805c106k8pactu-kemet-98697, RoHS=TRUE, Voltage Rating=10V
C9 C10: library part CMP-1036-00709-3, "General Purpose Ceramic Capacitor, 0805, 6.8pF, 0.25pF, C0G, 30ppm/°C, 100V", Capacitance=6.8pF, Case Code (Imperial)=0805, Case Code (Metric)=2012, Dielectric=C0G, Dielectric Material=Ceramic, Insulation Resistance=100GR, Max Operating Temperature=125°C, Min Operating Temperature=-55°C, Package Quantity=1, Temperature Coefficient=0ppm/°C, Tolerance=5%, Voltage=100V, Case/Package=0805, Construction=Flat, Contact Plating=Tin, Depth=1.25mm, Dissipation Factor=10%, Height=0.71mm, Lead Free="Lead Free", Length=2.01mm, Mount="Surface Mount", Number of Pins=2, Packaging="Tape and Reel", Radiation Hardening=No, REACH SVHC="No SVHC", RoHS Compliant=Yes, Series=-, Termination=SMD/SMT, Thickness=0.037inch, Voltage Rating=100V, Voltage Rating (DC)=100V, Width=0.049inch
C13 C14: library part CMP-2007-00302-2, "CAP CER 18PF 50V C0G/NP0 0805", Capacitance="18 pF", Manufacturer=KEMET, Package=C0805C-DN, Temperature="-55°C to +125°C", Temperature Characteristic=C0G, Temperature Coefficient=30ppm/°C, Temperature Range High=+125°C, Temperature Range Low=-55°C, Tolerance=0.05, Voltage Rating="50 V", Automotive=No, Category=Cap, ComponentLink2Description=Datasheet, ComponentLink2URL=https://content.kemet.com/datasheets/KEM_C1003_C0G_SMD.pdf, Device Class L1="Passive Components", Device Class L2=Capacitors, Device Class L3="Ceramic Capacitors", Digikey Description="CAP CER 18PF 50V C0G/NP0 0805", Height=0.88mm, Ipc Land Pattern Name=CAPC200125X78, Lead Free=Yes, Manufacturer Part Number=C0805C180J5GACTU, Material=Ceramic, Mouser Description="Cap Ceramic 18pF 50V C0G 5% SMD 0805 125C Paper T/R", Octopart=https://octopart.com/c0805c180j5gactu-kemet-144810, RoHS=TRUE
D1 D2 D3 D4: library part CMP-004-00034-2, "Led, Red/Grn, 180Mcd/230Mcd, 624Nm/525Nm Rohs Compliant: Yes"
D5 D6 D8: library part CMP-004-00036-1, "SMD Si-Diode 75V 100mA 0603"
D7: library part CMP-004-00035-1, "DIODE ZENER 3.3V 250MW SOT23"
J1 J2: library part CMP-002-00076-2, "Headers & Wire Housings .050 Tiger Eye High-Reliability Locking Socket Strip"
J3 J4: library part CMP-002-00077-1, "Conn Shrouded Header (4 Sides) HDR 20 POS 1.27mm Solder ST Top Entry SMD TIGER EYE™ Tube"
L1 L2: library part CMP-14484-000406-1, "SMD Power Inductors 10uH ±20% 1.9A 84.5mΩ", Case/Package=2424, Current Rating=1.9A, DC Resistance (DCR)=84.5mR, Inductance=10uH, Inductance Tolerance=20%, Max Operating Temperature=120°C, Min Operating Temperature=-25°C, Package Quantity=2000, Resistor Type=Wirewound, Self Resonant Frequency=20MHz, Test Frequency=100kHz, Core Material=Ferrite, Halogen Free="Halogen Free", Height=2.8mm, Height - Seated (Max)=0.11inch, Lead Free="Lead Free", Length=0.236inch, Max DC Current=1.9A, Mount="Surface Mount", Number of Pins=2, Packaging="Tape and Reel", RMS Current (Irms)=1.9A, RoHS Compliant=Yes, Saturation Current=1.9A, Series=NR, Shielding=Shielded, Termination=SMD/SMT, Tolerance=20%, Width=6mm
P1 P2: library part CMP-2000-05238-1, "Male Header, Pitch 1.25 mm, 1 x 4 Position, Height 3.4 mm, -40 to 85 degC, RoHS, Tape and Reel", Current Rating=1A, Manufacturer=Molex, Package Description="1.25mm Pitch PicoBlade(TM) Header, Surface Mount, Right Angle, Lead-Free, 4 Circuits", Voltage Rating=125V, Brand=Molex, Contact Material=PhosphorBronze, Contact Plating=Tin, Datasheet URL=http://www.molex.com/pdm_docs/sd/532610471_sd.pdf, Datasheet Version="Rev. G, 01/2012", Factory Pack Quantity=1000, Housing Material=Thermoplastic, Manufacturer URL=http://www.molex.com/, Mounting Angle=Right, Mounting Style=SMD/SMT, Number of Positions=4, Number of Positions / Contacts=4, Number Of Rows=1, Packaging=Reel, Pitch=1.25mm, Product Category=Headers&WireHousings, Product Type=Headers, RoHS=Details, Series=53261, Termination Style=SMD, Tradename=PicoBlade, Type=Shrouded
P3: library part CMP-002-00079-1, "Conn Shrouded Header (4 Sides) HDR 6 POS 1.25mm Solder RA Side Entry SMD PicoBlade™ T/R"
Q1 Q2 Q3 Q4: library part CMP-013-00036-1, "Trans MOSFET P-CH 20V 22.1A 8-Pin PowerPAK 1212 EP T/R"
R1 R6 R9 R12 R13 R16 R18 R19 R20 R21 R22 R23: library part CMP-1012-00623-3, "Chip Resistor, 10 KOhm, +/- 1%, 0.1 W, -55 to 155 degC, 0603 (1608 Metric), RoHS, Tape and Reel", Case Code (Imperial)=0603, Case Code (Metric)=1608, Manufacturer=Panasonic, Max Operating Temperature=155degC, Max Power Dissipation=100mW, Min Operating Temperature=-55degC, Package Description="2-Pin Surface Mount Device, Body 1.6 x 0.85 mm", Package Quantity=1, Package Reference=603, Resistance=10KOhm, Temperature Coefficient=100ppm\/degreesC, Tolerance=1%, Voltage Rating=75V, Case\/Package=0603, Composition=ThickFilm, Contact Plating=Tin, Datasheet URL=https://industrial.panasonic.com/cdbs/www-data/pdf/RDA0000/AOA0000C304.pdf, Datasheet Version=02/2017, Depth=0.8mm, Height=0.45mm, Lead Free=LeadFree, Length=1.6mm, Manufacturer URL=http://www.panasonic.com/, Military Standard=Not, Mount=SurfaceMount, Mounting Technology=SurfaceMount, Number of Pins=2, Number of Terminations=2, Packaging=TapeandReel, Power Rating=100mW, Radiation Hardening=No, REACH SVHC=NoSVHC, RoHSCompliant=true, Termination=SMD/SMT, Voltage Rating (DC)=75V, Width=0.031inch
R2 R7: library part CMP-2000-00213-2, "Chip Resistor, 120 Ohm, +/- 1%, 0.1 W, -55 to 155 degC, 0603 (1608 Metric), RoHS, Tape and Reel", Case Code (Imperial)=0603, Case Code (Metric)=1608, Manufacturer=Panasonic, Max Operating Temperature=155degC, Max Power Dissipation=100mW, Min Operating Temperature=-55degC, Package Description="2-Pin Surface Mount Device, Body 1.6 x 0.85 mm", Package Quantity=1, Resistance=120Ohm, Temperature Coefficient=100ppm/degreesC, Tolerance=1%, Voltage Rating=75V, Case/Package=0603, Composition=ThickFilm, Contact Plating=Tin, Datasheet URL=https://industrial.panasonic.com/cdbs/www-data/pdf/RDA0000/AOA0000C283.pdf, Datasheet Version=42095.0, Depth=0.8mm, Height=0.022inch, Lead Free=LeadFree, Length=1.6mm, Manufacturer URL=http://www.panasonic.com/, Military Standard=Not, Mount=SurfaceMount, Number of Pins=2, Number of Terminations=2, Package Reference=0603, Package URL=http://www.st.com/st-web-ui/static/active/en/resource/technical/document/datasheet/CD00001320.pdf, Packaging=TapeandReel, Power Rating=100mW, Radiation Hardening=No, REACH SVHC=NoSVHC, RoHSCompliant=true, Termination=SMD/SMT, Voltage Rating (DC)=75V, Width=0.031inch
R3 R5 R10: library part CMP-2000-03446-2, "RES Thick Film, 51Ω, 1%, 0.1W, 100ppm/°C, 0603", Case Code (Imperial)=0603, Case Code (Metric)=1608, Max Operating Temperature=155°C, Max Power Dissipation=100mW, Min Operating Temperature=-55°C, Package Quantity=10, Resistance=51R, Temperature Coefficient=100ppm/°C, Tolerance=1%, Voltage Rating=75V, Case/Package=0603, Composition="Thick Film", Contact Plating=Tin, Depth=0.85mm, Features="Automotive AEC-Q200", Height=0.45mm, Lead Free="Lead Free", Length=1.55mm, Military Standard=Not, Number of Pins=2, Number of Terminations=2, Packaging="Tape and Reel", Power Rating=100mW, Radiation Hardening=No, Termination=SMD/SMT, Voltage Rating (DC)=75V, Weight=7.1E-05oz, Width=0.85mm, Working Voltage=75V
R4 R8: library part CMP-2000-00435-2, "Chip Resistor, 330 Ohm, +/- 1%, 0.1 W, -55 to 155 degC, 0603 (1608 Metric), RoHS, Tape and Reel", Current Rating="500 mA", Max Operating Temperature="85 degC", Min Operating Temperature="-25 degC", Package Quantity=1500, Voltage Rating="10 V", ComponentLink1Description="Manufacturer URL", ComponentLink1URL=http://www.panasonic.com/, ComponentLink2Description=Datasheet, ComponentLink2URL=http://industrial.panasonic.com/cdbs/www-data/pdf/RDA0000/AOA0000C86.pdf, Contact Finish=Gold, Contact Material=Copper, Contact Plating=Gold, DatasheetVersion=Apr-15, Gender=Male, Height="1.45 mm", Lead Pitch="1.1 mm", Length="13.7 mm", Mating Cycles=10000, Mount="Surface Mount", PackageDescription="2-Pin Surface Mount Device, Body 1.6 x 0.85 mm", PackageReference=0603, Packaging="Tape and Reel", Pins=8, REACH SVHC="No SVHC", RoHSCompliant=true, Width="1.45 mm"
R11 R15: library part CMP-05422-000098-1, "RES 0.1 OHM 1% 1/2W 0805", Case Code (Imperial)=0805, Case Code (Metric)=2012, Max Operating Temperature=155°C, Max Power Dissipation=500mW, Min Operating Temperature=-55°C, Resistance=100mR, Resistor Type="Thick Film", Temperature Coefficient=150ppm/°C, Tolerance=1%, Case/Package=0805, Features="Automotive AEC-Q200", Height=0.028inch, Length=0.079inch, Number of Terminations=2, Packaging="Cut Tape", Width=0.049inch
R14 R17: library part CMP-2000-00925-1, "NOT PANASONIC, THIS IS A 1M RESISTORhttps://www.yageo.com/upload/media/product/productsearch/datasheet/rchip/PYu-RT_1-to-0.01_RoHS_L_13.pdf", Manufacturer=Panasonic, Part Number=ERA-3AEB163V
R24 R25: library part CMP-2000-03183-1, Manufacturer="Vishay Dale", Part Number=CRCW06032K70JNEA
SW1: library part CMP-10040-000029-1, "SWITCH TACTILE SPST-NO 0.02A 15V", Current Rating=5A, Flammability Rating="UL94 V-0", Insulation Color=Black, Max Operating Temperature=85°C, Min Operating Temperature=-40°C, Operating Force=240gf, Actuator Type=Standard, Connector Type=USB, Contact Plating=Gold, Gender=Receptacle, Illumination Type=Non-Illuminated, Mechanical Life=500000Cycles, Mount="Surface Mount", Number Of Contacts=24, Number of Ports=1, Packaging="Tape and Reel", Switch Function=Off-Mom, Switch Travel=0.13mm, Termination=Solder, Throw Configuration=SPST
TP1 TP2 TP3 TP4 TP5 TP6 TP7 TP8 TP9 TP10 TP12 TP13 TP14: library part CMP-00028-00002-2, "0.6mm round", Pins=1
U1: library part CMP-016-00010-6, "Rudimentary symbol and footprint for the SAM E51 microcontroller"
U2 U5: library part CMP-04872-000178-1, "IC TRANSCEIVER 1/1 SOT23-8", Case/Package=SOT-23-8, Max Operating Temperature=125°C, Min Operating Temperature=-40°C, Data Rate=1Mbps, Lead Free="Lead Free", Mount="Surface Mount", Packaging="Tape and Reel", RoHS Compliant=Yes
U3 U4: library part CMP-04896-000098-1, "40V, RAIL-TO-RAIL INPUT, PUSH-PU"
Y1: library part CMP-27762-011708-1, "Crystal 48MHz ±20ppm 18pF SMD-4 3.2mm x 2.5mm", Case/Package=CSMD, ESR (Equivalent Series Resistance)=35R, Frequency=48MHz, Frequency Stability=50ppm, Frequency Tolerance=20ppm, Load Capacitance=18pF, Max Operating Temperature=70°C, Min Operating Temperature=-20°C, Operating Frequency="48 MHz", Package Quantity=1000, Resistor Type=Ceramic, Depth=2.5mm, Height=0.031inch, Lead Free="Lead Free", Length=3.2mm, Mount="Surface Mount", Number of Pins=4, Packaging="Tape and Reel", Radiation Hardening=No, REACH SVHC="No SVHC", RoHS Compliant=Yes, Series=ABM8, Series Resistance=35R, Termination=SMD/SMT, Tolerance=20ppm, Width=0.098inch
Y2: library part CMP-40224-000006-1, "CRYSTAL 32.7680KHZ 12.5PF SMD", Frequency=32.768kHz, Load Capacitance=12.5pF, Manufacturer="ECS International", Package=ECX-1210, Temperature="-40°C to +85°C", Temperature Range High=+85°C, Temperature Range Low=-40°C, Tolerance=20ppm, Automotive=No, Category=Crys, ComponentLink2Description=Datasheet, ComponentLink2URL=https://ecsxtal.com/store/pdf/ECX-1210.pdf, Device Class L1="Passive Components", Device Class L2="Crystals / Oscillators", Device Class L3=Crystals, Digikey Description="CRYSTAL 32.7680KHZ 12.5PF SMD", Esr=90kΩ, Height=0.5mm, Lead Free=Yes, Manufacturer Part Number=ECS-.327-12.5-1210-TR, Octopart=https://octopart.com/ecs-.327-12.5-1210-tr-ecs+international-81221340, RoHS=TRUE, Series=ECX-1210

## Via types
v1: diameter 0.5, hole 0.3, Top Layer to Bottom Layer, 47 vias
v2: diameter 0.7, hole 0.5, Top Layer to Bottom Layer, 40 vias
v3: diameter 1.27, hole 0.711, Top Layer to Bottom Layer, 1 vias

## Nets (pads, with @x,y where several pads share a name; then routed paths per layer and width w, separated by ;. In a path a pad name is that pad's centre, name@x,y a point inside that pad or via, vN(x,y) a via of type N, cw(c..) or ccw(c..) an arc to the next point about the centre after c; other vN are vias at no path point)
3V3: C1.1 C5.1 C7.1 C8.1 C12.2 C17.2 D1.3 D2.2 D2.3 L1.1 P3.5 Q4.5-6-7-8 R1.2 R6.1 R19.2 TP3.1 U1.21 U1.34 U1.48 U1.56 U2.3 U5.3 | length 20.8
  Top Layer w0.3: U5.3 v1(-16.525,-10.375) ; U2.3 -17.988,11.062 -16.562,11.062 v1(-16.525,11.1) ; v1(5.825,17.45) R1.2 ; v1(14.4,18.85) 14.55,18.85 14.618,18.782 15.018,18.782 17.3,16.5 D2.2
  Bottom Layer w0.3: v1(-15,16.013) -15,14.85 C5.1 -14.04,13.89 -13.472,13.89 -13.257,13.675 U1.48 ; v1(-14.175,6.675) U1.34 ; U1.56 -8,16.6 v1(-7.9,16.7) ; U1.21 C8.1 -5.375,2.9 v1(-5.375,2.857) ; v3@-5.89,0.845 v3(-5.757,0.713)
  other v1: 3.375,15.1 -1.875,19 -11.975,19.65
3V3_CUTOFF_MOSFET: D6.C D8.A Q3.4 Q4.4 R13.2 | length 16.1
  Top Layer w0.3: Q3.4 -8.975,1.647 -8.95,1.672 -8.95,1.747 -8.621,2.077 -7.171,2.077 -7.023,1.929 -7.023,-0.099 -7.199,-0.275 -7.5,-0.275 Q4.4 -7.6,-0.3 -8.122,-0.822 -8.646,-0.822 v1(-8.684,-0.86)
  Bottom Layer w0.3: R13.2 -10.925,-6.375 -10.175,-5.625 -10.175,-5.1 -10.102,-5.028 -9.948,-5.028 -9.948,-4.607 -9.925,-4.584 -9.504,-4.584 -8.684,-3.764 v1(-8.684,-0.86) -8.684,0.234 D8.A@-8.7,0.25 ; D6.C@-10.175,-5.13 -10.175,-4.925 D6.C D6.C@-10.05,-5.13
3V3_OC_TP: D6.A R17.1 TP10.1 U4.1 | length 6.3
  Top Layer w0.3: v1(-11.822,-4.767) -11.822,-3.997 TP10.1
  Bottom Layer w0.3: R17.1 U4.1 -12.175,-4.475 v1@-11.875,-4.775 ; v1(-11.822,-4.767) -11.283,-4.767 D6.A
3V3_POST_SHUNT: Q3.5-6-7-8 R15.2 U4.3 | length 2
  Top Layer w0.3: v1(-12.175,-1.375) -12.175,0.472 -12.1,0.547
3V3_PRE_SHUNT: J1.09 J1.10 J1.11 J1.12 J3.09 J3.10 J3.11 J3.12 R15.1 R16.2 | length 1.2
  Top Layer w0.3: v1(-15.625,-0.6) R15.1
  other v2: -21.715,-0.635 -18.285,-0.633 -21.715,0.635 -18.285,0.635
3V3_SENSE: R19.1 R23.2 U1.62 | length 11.6
  Top Layer w0.3: R23.2 R19.1 -10.9,19.425 -10.9,19.199 -10.9,16.825 -10.2,16.125 -5.304,16.125 -5.054,15.875 v1(-5,15.875)
  Bottom Layer w0.3: U1.62 v1(-5,15.875)
5V: D1.2 Q2.5-6-7-8 R18.2 TP1.1 | length 55.7
  Top Layer w0.3: TP1.1 -13.057,16.057 -13.282,16.057 -13.75,16.525 -13.75,19.125 -12.35,20.525 -7.75,20.525 -6.5,19.275 -4.425,19.275 -4.075,18.925 -4.075,18.25 -3.7,17.875 -3.025,17.875 -2.425,17.275 -0.85,17.275 -0.2,16.625 -0.2,16.525 0.025,16.3 6.575,16.3 ; Q2.5-6-7-8 -3.575,6.705 -3.575,9.85 -2.002,11.423 0.123,11.423 2.35,13.65 6.175,13.65 6.725,14.2 6.725,16.15 6.575,16.3 ; D1.2 14.25,17.95 12.6,16.3 6.575,16.3
5V_CUTOFF_MOSFET: D5.C D8.C Q1.4 Q2.4 R9.2 | length 14.1
  Top Layer w0.3: R9.2 -13.675,2.525 -13.3,2.15 -11.386,2.15 -10.986,2.55 v1(-9.05,2.55) -8.485,2.55 -7.627,3.407 -7.627,3.482 -7.602,3.507 Q2.4 -7.502,3.532 -7.202,3.532 -7.026,3.708 -7.026,5.737 -7.173,5.884 -8.626,5.884 -8.952,5.557 -8.952,5.482 -8.977,5.457 Q1.4
  Bottom Layer w0.3: D5.C -10.025,0.425 -9.9,0.3 D8.C@-9.9,0.25
5V_OC_TP: D5.A R14.1 TP9.1 U3.1 | length 11
  Top Layer w0.3: v1(-14.432,0.643) -14.432,-1.218 -12.64,-3.01 -11.885,-3.01 -11.057,-2.182 -11.057,-1.962 TP9.1
  Bottom Layer w0.3: v1(-14.432,0.643) -14.432,1.668 R14.1 ; v1@-14.424,0.635 D5.A@-13.2,0.635 ; R14.1@-14.25,1.75 U3.1
5V_POST_SHUNT: Q1.5-6-7-8 R11.2 U3.3
  other v1: -12.225,3.65
5V_PRE_SHUNT: J1.03 J1.04 J1.05 J1.06 J3.03 J3.04 J3.05 J3.06 R11.1 R12.2
  other v1: -15.625,4.425
  other v2: -21.715,3.175 -18.285,3.175 -21.715,4.445 -18.285,4.445
5V_SENSE: R18.1 R22.2 U1.63 | length 6
  Top Layer w0.3: v1(-4.425,15.475) -4.425,17.125 -4.15,17.4 -3.149,17.4 -2.599,16.85 -2.55,16.85 -2.325,16.625 R22.2 R18.1
  Bottom Layer w0.3: U1.63 -4.5,15.346 -4.425,15.421 v1(-4.425,15.475)
CAN0_R_N: J1.16 J3.16 R2.1 TP7.1 U2.6 | length 27
  Top Layer w0.2: v2(-18.285,-3.175) TP7.1
  Top Layer w0.3: v1(-20.625,11.025) -20.55,10.95 -19.859,10.95 -19.81,10.901 -19.562,10.901 -19.349,11.113 -19.349,12.049 -18.976,12.423 -18.976,12.799 -19.152,12.975 -19.25,12.975 R2.1
  GND w0.3: v1(-20.625,11.025) -20.663,10.987 -20.933,10.987 -21.018,10.901 -21.441,10.901 -22.676,9.666 -22.777,9.431 -22.777,-3.033 -21.984,-3.825 -21.446,-3.825 -21.065,-3.444 -21.065,-3.351 -20.889,-3.175 v2@-18.635,-3.175
CAN0_R_P: J1.15 J3.15 R2.2 TP5.1 U2.7 | length 26.8
  Top Layer w0.2: v2(-21.715,-3.175) -21.445,-2.905 -20.355,-2.905 -19.983,-2.533 -16.128,-2.533 TP5.1
  Top Layer w0.3: v1(-20.625,10.375) -20.55,10.45 -19.859,10.45 -19.81,10.499 -19.395,10.499 -18.948,10.947 -18.948,11.883 -18.574,12.257 -18.574,12.799 -18.398,12.975 -18.3,12.975 R2.2
  GND w0.3: v2(-21.715,-3.175) -21.792,-3.098 -22.143,-3.098 -22.375,-2.866 -22.375,9.349 -22.337,9.437 -21.275,10.499 -21.018,10.499 -20.933,10.413 -20.663,10.413 v1(-20.625,10.375)
CAN0_RX: U1.44 U2.4 | length 5.6
  Bottom Layer w0.3: v1(-18.025,11.675) -15.295,11.675 U1.44
CAN0_TX: U1.43 U2.1 | length 6.2
  Bottom Layer w0.3: v1(-18.025,9.725) -16.039,9.725 -14.589,11.175 U1.43
CAN1_R_N: J1.20 J3.20 R7.1 TP8.1 U5.6 | length 15.2
  Top Layer w0.2: v2(-18.285,-5.715) TP8.1
  Top Layer w0.3: v2(-18.285,-5.715) -18.68,-5.715 -18.9,-5.935 -18.9,-7.761 -19.544,-8.405 -19.623,-8.405 -20.035,-8.817 -20.035,-8.836 -20.447,-9.248 -21.279,-9.248 -21.675,-9.644 -21.675,-9.925 -21.287,-10.313 -20.687,-10.313 U5.6 -20.55,-10.45 -19.859,-10.45 -19.81,-10.499 -19.395,-10.499 -18.948,-10.947 -18.948,-11.883 -18.549,-12.282 -18.549,-12.799 -18.373,-12.975 -18.275,-12.975 R7.1
CAN1_R_P: J1.19 J3.19 R7.2 TP6.1 U5.7 | length 18.6
  Top Layer w0.2: v2(-21.715,-5.715) -21.32,-5.715 -20.625,-5.715 -19.955,-5.045 -16.1,-5.045 TP6.1
  Top Layer w0.3: J3.19@-21.32,-5.715 -21.1,-5.935 -21.1,-7.761 -20.438,-8.423 -20.438,-8.671 -20.614,-8.847 -21.446,-8.847 -22.077,-9.478 -22.077,-10.091 -21.959,-10.209 -21.218,-10.95 -20.7,-10.95 U5.7 -20.55,-10.95 -19.859,-10.95 -19.81,-10.901 -19.562,-10.901 -19.349,-11.113 -19.349,-12.049 -18.951,-12.448 -18.951,-12.799 -19.127,-12.975 -19.225,-12.975 R7.2
CAN1_RX: U1.28 U5.4 | length 22.7
  Bottom Layer w0.3: v1(-18.025,-9.725) -13.575,-9.725 -7.675,-3.825 -7.675,0.925 -8.5,1.75 -8.5,3.186 -9.5,4.186 U1.28
CAN1_TX: U1.27 U5.1 | length 24
  Bottom Layer w0.3: v1(-18.025,-11.675) -14.925,-11.675 -7.273,-4.023 -7.273,1.091 -8.098,1.916 -8.098,3.352 -9,4.254 U1.27
G_LED: R3.2 U1.4 | length 20.5
  Bottom Layer w0.3: U1.4 -1.353,12.175 -0.978,11.8 -0.5,11.8 0.25,12.55 0.25,14.475 1.975,16.2 R3.2
GND: C1.2 C2.1 C3.2 C4.2 C5.2 C6.2 C7.2 C8.2 C9.1 C10.1 C11.2 C12.1 C13.2 C14.2 C15.2 C16.2 C17.1 D7.1 J1.07 J1.08 J1.13 J1.14 J1.17 J1.18 J2.09 J2.10 J2.11 J2.12 J2.13 J2.14 J2.15 J2.16 J2.17 J2.18 J2.19 J2.20 J3.07 J3.08 J3.13 J3.14 J3.17 J3.18 J4.09 J4.10 J4.11 J4.12 J4.13 J4.14 J4.15 J4.16 J4.17 J4.18 J4.19 J4.20 P3.6 P3.S1 P3.S2 R8.2 R9.1 R10.2 R13.1 R22.1 R23.1 R24.1 R25.1 SW1.2 TP4.1 TP13.1 TP14.1 U1.7 U1.22 U1.33 U1.47 U1.54 U1.65 U2.2 U3.2 U4.2 U5.2 Y1.2 Y1.4 | length 10.6
  Top Layer w0.3: C10.1 -8.9,10.675 Y1.4 ; Y1.2 C9.1
  Bottom Layer w0.3: C2.1 -9,16.321 U1.54 -9,11.175 U1.65
  other v1: -12.175,-2.325 -12.225,2.7 -7.75,10.725 -3.125,19 -8.364,19.652
  other v2: 18.285,-5.715 21.715,-5.715 -21.715,-4.475 -18.285,-4.445 18.285,-4.445 21.715,-4.445 18.285,-3.175 21.715,-3.175 -18.285,-1.933 -21.715,-1.905 18.285,-1.905 21.715,-1.905 18.285,-0.635 21.715,-0.635 18.285,0.635 21.715,0.635 -21.715,1.905 -18.285,1.905
NetC2_2: C2.2 C3.1 L2.2 U1.53 | length 3.1
  Bottom Layer w0.3: C2.2 -9.827,16.352 -9.827,17.623 v1(-9.8,17.65) ; C2.2@-9.696,16.189 -9.696,15.896 -9.5,15.7 U1.53
NetC15_1: C15.1 R12.1 R14.2 U3.4 | length 7.9
  Bottom Layer w0.3: R14.2@-15.55,1.75 -15.625,1.825 R12.1 -14.6,3.125 -14.322,3.403 -14.322,3.803 -13.8,4.325 -11.1,4.325 -10.425,3.65 U3.4
NetC16_1: C16.1 R16.1 R17.2 U4.4 | length 7.9
  Bottom Layer w0.3: R17.2 -15.625,-3.25 R16.1 -14.55,-1.9 -14.318,-1.668 -14.318,-1.226 -13.917,-0.825 -10.928,-0.825 -10.378,-1.375 U4.4
NetD1_1: D1.1 R8.1
  other v1: 12.8,17.95
NetD1_4: D1.4 R10.1 | length 5.1
  Top Layer w0.3: R10.1@7.825,18.65 8.025,18.85 D1.4
NetD2_1: D2.1 R5.1
  other v1: 15.7,15.05
NetD2_4: D2.4 R3.1
  other v1: 15.7,15.95
NetL2_1: L2.1 U1.55 | length 1.6
  Bottom Layer w0.3: U1.55 -8.5,13.95 v1(-7.75,13.2)
NetQ1_1: Q1.1 Q1.2 Q1.3 Q2.1 Q2.2 Q2.3
NetQ3_1: Q3.1 Q3.2 Q3.3 Q4.1 Q4.2 Q4.3
NetR4_2: R4.2 SW1.1 | length 2
  Top Layer w0.3: R4.2 9.15,17.45 9.525,17.075 SW1.1
PYRO_PWR: J2.01 J2.02 J2.03 J2.04 J2.05 J2.06 J2.07 J2.08 J4.01 J4.02 J4.03 J4.04 J4.05 J4.06 J4.07 J4.08 R21.2 TP12.1 | length 5.6
  Top Layer w0.3: TP12.1 v2(18.285,5.715)
  Bottom Layer w0.3: R21.2 17.135,6.475 17.675,5.935 17.895,5.715 v2(18.285,5.715)
  other v2: 18.285,1.905 21.715,1.905 18.285,3.175 21.715,3.175 18.285,4.445 21.715,4.445 21.715,5.715
PYRO_PWR_SENSE: D7.3 R21.1 R25.2 U1.64 | length 31
  Bottom Layer w0.3: U1.64 -4,14.8 -2.85,15.95 0.875,15.95 1.575,16.65 13.3,16.65 13.7,17.05 16.224,17.05 16.4,16.874 16.4,14.2 16.05,13.85 16.05,9.35 R25.2 R21.1
R_LED: R5.2 U1.5 | length 20.9
  Bottom Layer w0.3: U1.5 -1.45,11.675 -1.275,11.5 -1.246,11.5 -1.144,11.398 -0.327,11.398 0.6,12.325 0.6,12.332 0.652,12.384 0.652,14.309 2.118,15.775 13.371,15.775 14.216,14.93 R5.2
RESETN: C11.1 P3.4 R4.1 R6.2 U1.52 | length 24.9
  Top Layer w0.3: v1(-0.625,19) -0.625,18.6 0.525,17.45 4.475,17.45 5.173,16.752 6.449,16.752 6.625,16.927 6.625,17.225 R4.1
  Bottom Layer w0.3: U1.52 -10,15.375 C11.1 -10.95,18.175 -8.775,20.35 -1.975,20.35 v1(-0.625,19)
SWCLK: P3.3 R1.1 U1.57 | length 16.3
  Top Layer w0.3: v1(0.625,19) 0.625,19.4 1.425,20.2 3.725,20.2 4.525,19.4 R1.1
  Bottom Layer w0.3: U1.57 -7.5,15.65 -5.8,17.35 -1.025,17.35 v1(0.625,19)
SWDIO: P3.2 U1.58 | length 11.3
  Bottom Layer w0.3: U1.58 -7,15.525 -5.625,16.9 -0.225,16.9 v1(1.875,19)
SWO: P3.1 U1.59 | length 12
  Bottom Layer w0.3: U1.59 -6.5,15.399 -5.449,16.45 0.575,16.45 v1(3.125,19)
VCC: J1.01 J1.02 J3.01 J3.02 R20.2 TP2.1 U3.6 U4.6 | length 39.3
  Top Layer w0.3: v2(-18.285,5.715) -17.195,5.715 -16.975,5.935 -16.975,6.768 -15.968,7.775 R20.2 -15.968,7.875 -13,10.843 TP2.1
  Bottom Layer w0.3: v2(-18.285,5.715) -17.895,5.715 -16.8,4.62 -16.8,0.635 ; U3.6@-10.168,1.706 -10.194,1.68 -10.543,1.68 -11.048,1.175 -12.331,1.175 -12.545,0.961 -12.545,-0.174 -12.72,-0.35 -14.515,-0.35 -15.5,0.635 -16.8,0.635 ; U4.6 -10.35,-3.275 -10.65,-3.575 -10.65,-5.399 -10.826,-5.575 -14.7,-5.575 -16.8,-3.475 -16.8,0.635
  other v2: -21.715,5.715
VCC_SENSE: R20.1 R24.2 U1.61 | length 15.4
  Top Layer w0.3: R20.1 R24.2 -13.75,7.9 -11.75,9.9 -11.75,13.425 -10.55,14.625 -6.496,14.625 v1(-5.625,15.496)
  Bottom Layer w0.3: v1(-5.625,15.496) -5.5,15.371 U1.61
VDD_ANA: C4.1 C6.1 L1.2 U1.8 | length 4.2
  Top Layer w0.3: C4.1@-1.475,10.375 L1.2@0.625,10.375
  Bottom Layer w0.3: U1.8 v1(-1.025,10.175)
X_IN: C9.2 U1.31 Y1.3 | length 9.8
  Top Layer w0.3: v1(-9.85,7.05) -9.825,7.025 -8.875,7.025 -7.775,8.125 -7.775,9.625 -6.7,10.7 Y1.3 -5,10.7 C9.2
  Bottom Layer w0.3: U1.31 -11,5.922 -9.872,7.05 v1(-9.85,7.05)
X_OUT: C10.2 U1.32 Y1.1 | length 5.8
  Top Layer w0.3: v1(-10.8,7.025) -9.375,8.45 -9.375,8.575 Y1.1@-9.275,8.675 ; C10.2 Y1.1@-9.275,8.675 ; Y1.1@-9.187,8.762 Y1.1@-9.275,8.675
  Bottom Layer w0.3: U1.32 -11.5,6.325 v1(-10.8,7.025)
XIN_32: C13.1 U1.1 Y2.1 | length 3.1
  Bottom Layer w0.3: U1.1 -1.195,13.675 -1.032,13.838 Y2.1 v1(-0.75,14.5)
XOUT_32: C14.1 U1.2 Y2.2 | length 3.1
  Bottom Layer w0.3: U1.2 -1.195,13.175 -1.032,13.012 Y2.2 v1(-0.75,12.35)
pads on no net: D3.1 D3.2 D3.3 D3.4 D4.1 D4.2 D4.3 D4.4 D7.2 J1. J2. J3. J4. P1.1 P1.2 P1.3 P1.4 P1.MP1 P1.MP2 P2.1 P2.2 P2.3 P2.4 P2.MP1 P2.MP2 U1.3 U1.6 U1.9 U1.10 U1.11 U1.12 U1.13 U1.14 U1.15 U1.16 U1.17 U1.18 U1.19 U1.20 U1.23 U1.24 U1.25 U1.26 U1.29 U1.30 U1.35 U1.36 U1.37 U1.38 U1.39 U1.40 U1.41 U1.42 U1.45 U1.46 U1.49 U1.50 U1.51 U1.60 U2.5 U2.8 U3.5 U4.5 U5.5 U5.8

## Polygon pours and split planes (outlines as drawn)
GND on Top Layer "GND_L01_P017" (solid, pour order 17): -15.806,-19.201 ccw(c-13.96,-17) -13.96,-19.873 13.96,-19.873 ccw(c13.96,-17) 15.806,-19.201 cw(c15.888,-19.298) 15.949,-19.186 ccw(c0,0) 24.95,0 ccw(c0,0) -15.949,-19.186 cw(c-15.888,-19.298)
3V3_PRE_SHUNT on Top Layer "3V3_PRE_SHUNT_L01_P000" (solid, pour order 0): -16.825,1.005 -16.2,1.21 -15.05,1.21 -15.05,0.075 -16.825,-1.005 -23.175,-1.005 -23.175,1.005
NetQ3_1 on Top Layer "NETQ3_1_L01_P007" (solid, pour order 7): -9.3,1.172 -9.3,-0.478 -8.8,-0.478 -7.775,0.172 -7.275,0.172 -7.275,1.822 -7.775,1.822 -8.8,1.172
3V3_POST_SHUNT on Top Layer "3V3_POST_SHUNT_L01_P003" (solid, pour order 3): -13.85,1.21 -12.1,1.847 -11.825,1.897 -9.82,1.897 -9.82,-0.553 -11.775,-0.553 -11.8,-0.553 -12.137,-0.503 -13.85,0.06
NetQ1_1 on Top Layer "NETQ1_1_L01_P004" (solid, pour order 4): -9.302,4.982 -9.302,3.332 -8.802,3.332 -7.777,3.982 -7.277,3.982 -7.277,5.632 -7.777,5.632 -8.802,4.982
5V_POST_SHUNT on Top Layer "5V_POST_SHUNT_L01_P002" (solid, pour order 2): -13.853,5.02 -12.102,5.657 -11.827,5.707 -9.822,5.707 -9.822,3.257 -11.777,3.257 -11.802,3.257 -12.14,3.307 -13.853,3.87
5V_PRE_SHUNT on Top Layer "5V_PRE_SHUNT_L01_P001" (solid, pour order 1): -23.175,4.815 -16.825,4.815 -16.202,5.02 -15.052,5.02 -15.052,3.87 -16.825,2.805 -23.175,2.805
3V3 on PWR "3V3_L02_P012" (solid, pour order 12): -15.806,-19.201 ccw(c-13.96,-17) -13.96,-19.873 13.96,-19.873 ccw(c13.96,-17) 15.806,-19.201 cw(c15.888,-19.298) 15.949,-19.186 ccw(c0,0) 24.95,0 ccw(c0,0) -15.949,-19.186 cw(c-15.888,-19.298)
PYRO_PWR on PWR "PYRO_PWR_L02_P011" (solid, pour order 11): 16.825,6.085 23.175,6.085 23.175,1.535 16.825,1.535
3V3_PRE_SHUNT on PWR "3V3_PRE_SHUNT_L02_P010" (solid, pour order 10): -23.175,1.005 -16.825,1.005 -16.825,-1.005 -23.175,-1.005
5V_PRE_SHUNT on PWR "5V_PRE_SHUNT_L02_P009" (solid, pour order 9): -23.175,4.815 -16.825,4.815 -16.825,2.805 -23.175,2.805
VCC on PWR "VCC_L02_P008" (solid, pour order 8): -23.175,6.085 -16.825,6.085 -16.825,5.345 -23.175,5.345
GND on GND "GND_L03_P015" (solid, pour order 15): -15.806,-19.201 ccw(c-13.96,-17) -13.96,-19.873 13.96,-19.873 ccw(c13.96,-17) 15.806,-19.201 cw(c15.888,-19.298) 15.949,-19.186 ccw(c0,0) 24.95,0 ccw(c0,0) -15.949,-19.186 cw(c-15.888,-19.298)
GND on Bottom Layer "GND_L04_P018" (solid, pour order 18): -15.806,-19.201 ccw(c-13.96,-17) -13.96,-19.873 13.96,-19.873 ccw(c13.96,-17) 15.806,-19.201 cw(c15.888,-19.298) 15.949,-19.186 ccw(c0,0) 24.95,0 ccw(c0,0) -15.949,-19.186 cw(c-15.888,-19.298)

## Silkscreen, mask and mechanical layers (free items; w line width, h text height)
Top Overlay:
  region: 980 vertices and 2 holes, not listed, extent 14.33,-15.265 19.53,-8.999
  text "DBG" at 7.15,23.149 h0.75 r270
  text "DBG" at -7.15,21.15 h0.75 r90
  text "RST" at 9.05,20.95 h0.75
  text "PWR" at 11.65,19.45 h0.75
  text "3V3" at -15.666,16.6 h0.5
  text "5V" at -13.417,16.6 h0.5
  text "MCU" at 15.15,16.55 h0.75
  text "GND" at -15.666,14.6 h0.5
  text "VCC" at -13.666,14.6 h0.5
  text "STAT1" at 16.575,13.55 h0.75
  text "CAN_0" at -16.9,11.95 h0.75
  text "STAT2" at 18.125,10.55 h0.75
  text "PYRO" at 13.1,5.465 h0.5
  text "GND" at 13.35,4.195 h0.5
  text "C0_HI" at -14.858,-2.108 h0.5
  text "5V_OC" at -10.108,-2.113 h0.5
  text "C0_LO" at -14.942,-3.383 h0.5
  text "3V3_OC" at -10.358,-3.383 h0.5
  text "C1_HI" at -14.817,-4.653 h0.5
  text "GND" at -9.609,-4.695 h0.5
  text "C1_LO" at -14.9,-5.923 h0.5
  text "CAN_1" at -16.9,-9.525 h0.75
  text "HYDRA_V3_TEMPLATE" at 0.15,-11.725 h0.75
  text "Designed with contempt" at 0.1,-12.733 h0.5
Bottom Overlay:
  text "MCU" at -0.98,15.05 h0.75
  text "OC PROT / LOGIC" at -3.876,-3.9 h0.75
Mechanical 1:
  lines w0.1: -15.888,-19.298 ccw(c-13.96,-17) -13.96,-20 13.96,-20 ccw(c13.96,-17) 15.888,-19.298 15.868,-19.318 ccw(c0,0) -15.868,-19.318
  lines w0.254: -15.888,-19.298 ccw(c-13.96,-17) -13.96,-20 13.96,-20 ccw(c13.96,-17) 15.888,-19.298